# Altium PCB HEAD_PCB.PcbDoc
Units mm, origin at the board's own origin, x right, y up, seen from the top; angles counter-clockwise.
Board outline 50 x 50 mm, 4 copper layers (L1 (Signal), L2 (GND), L3 (+3V3), L4 (Signal)), stack 1.586 mm thick; 73 components, 49 nets, 271 pads, 159 vias.
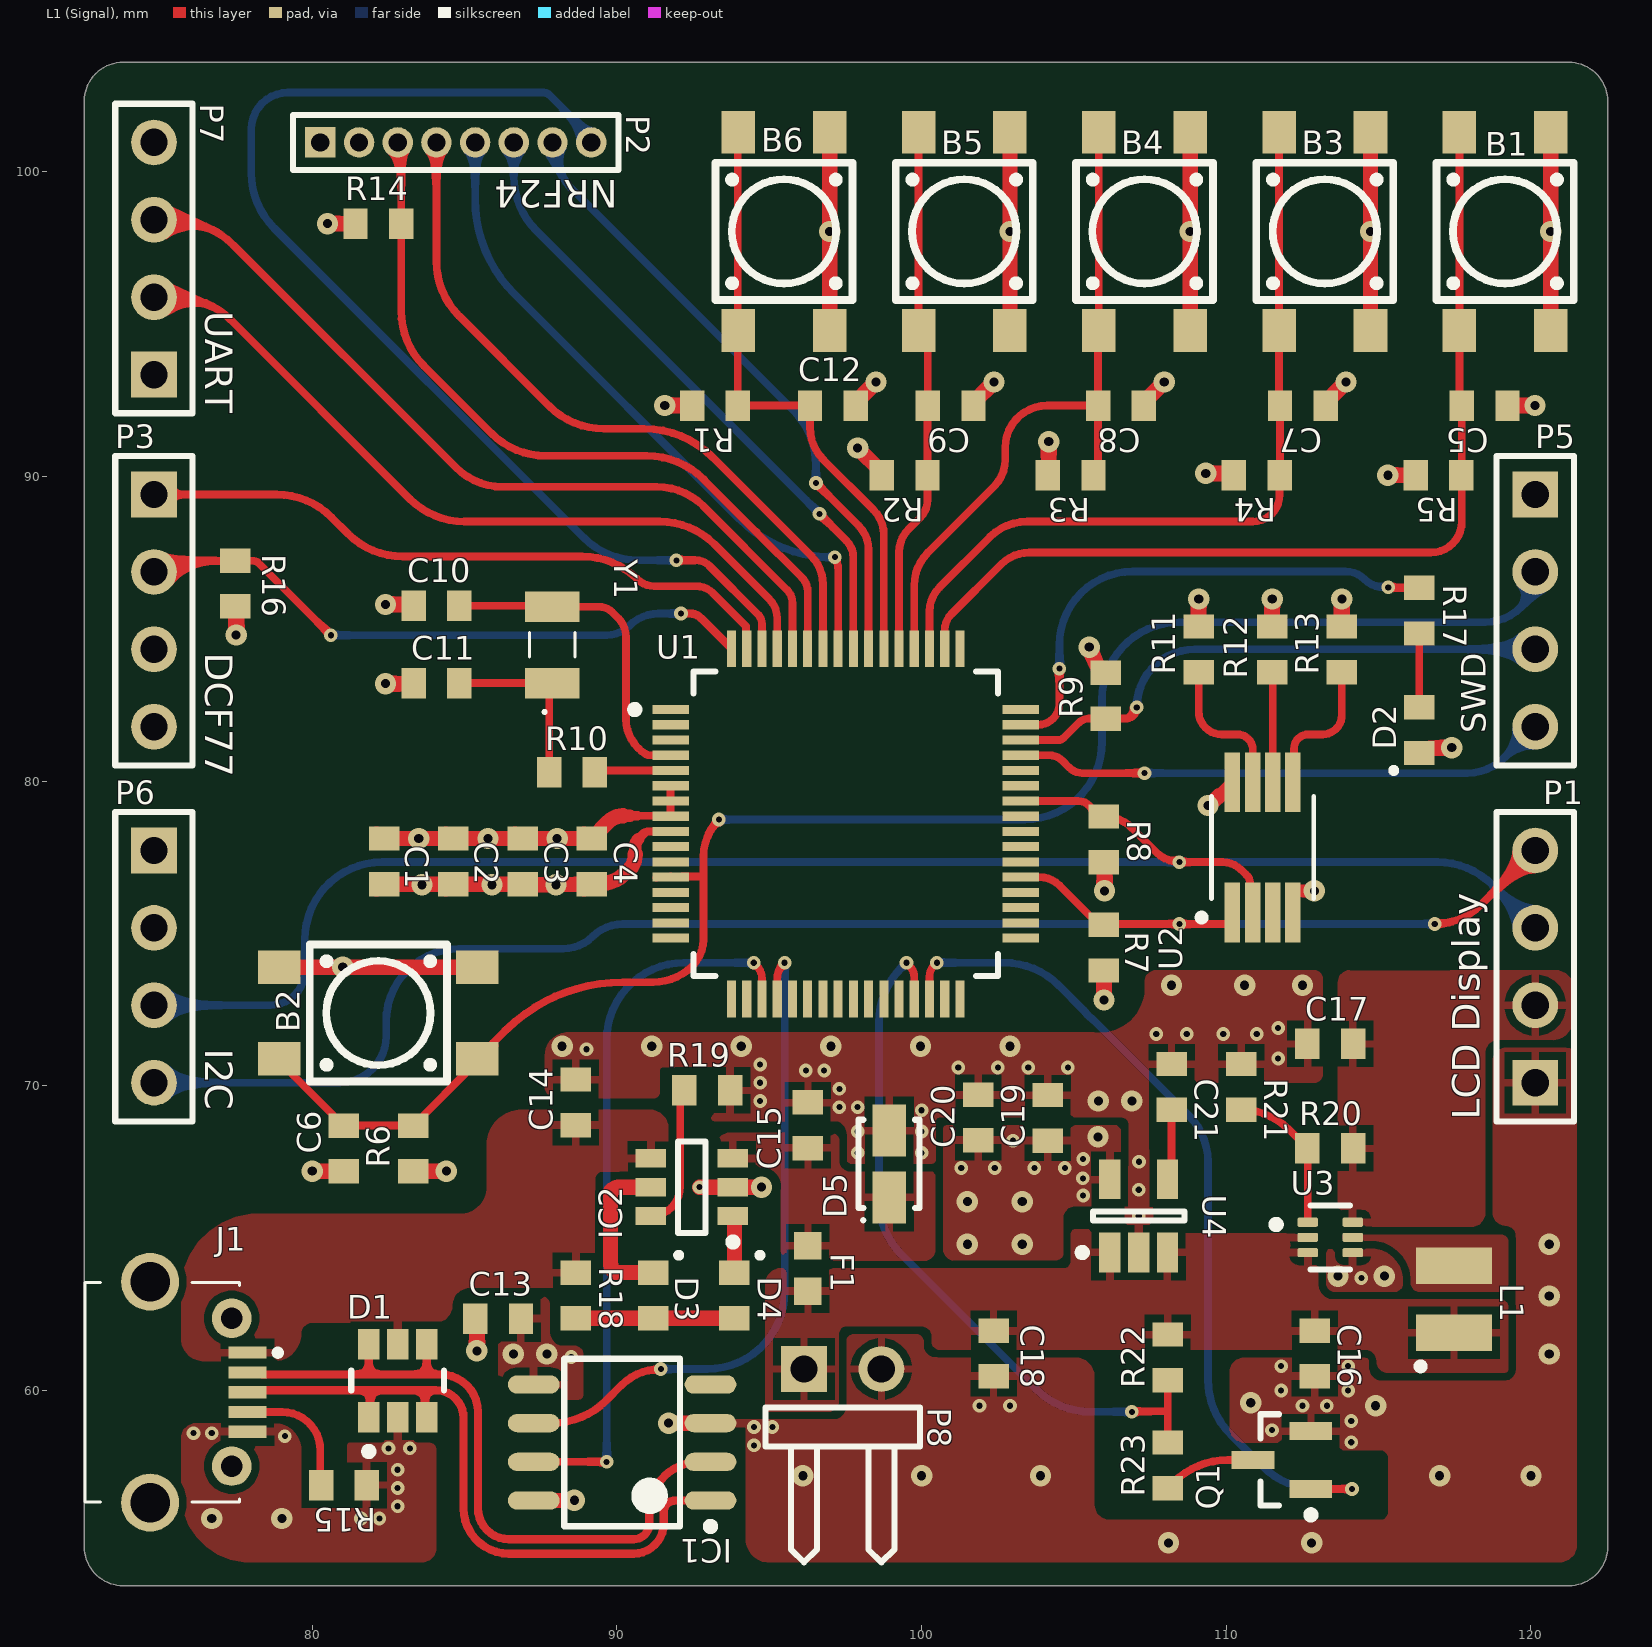
[diagram p0: L1 (Signal) view]
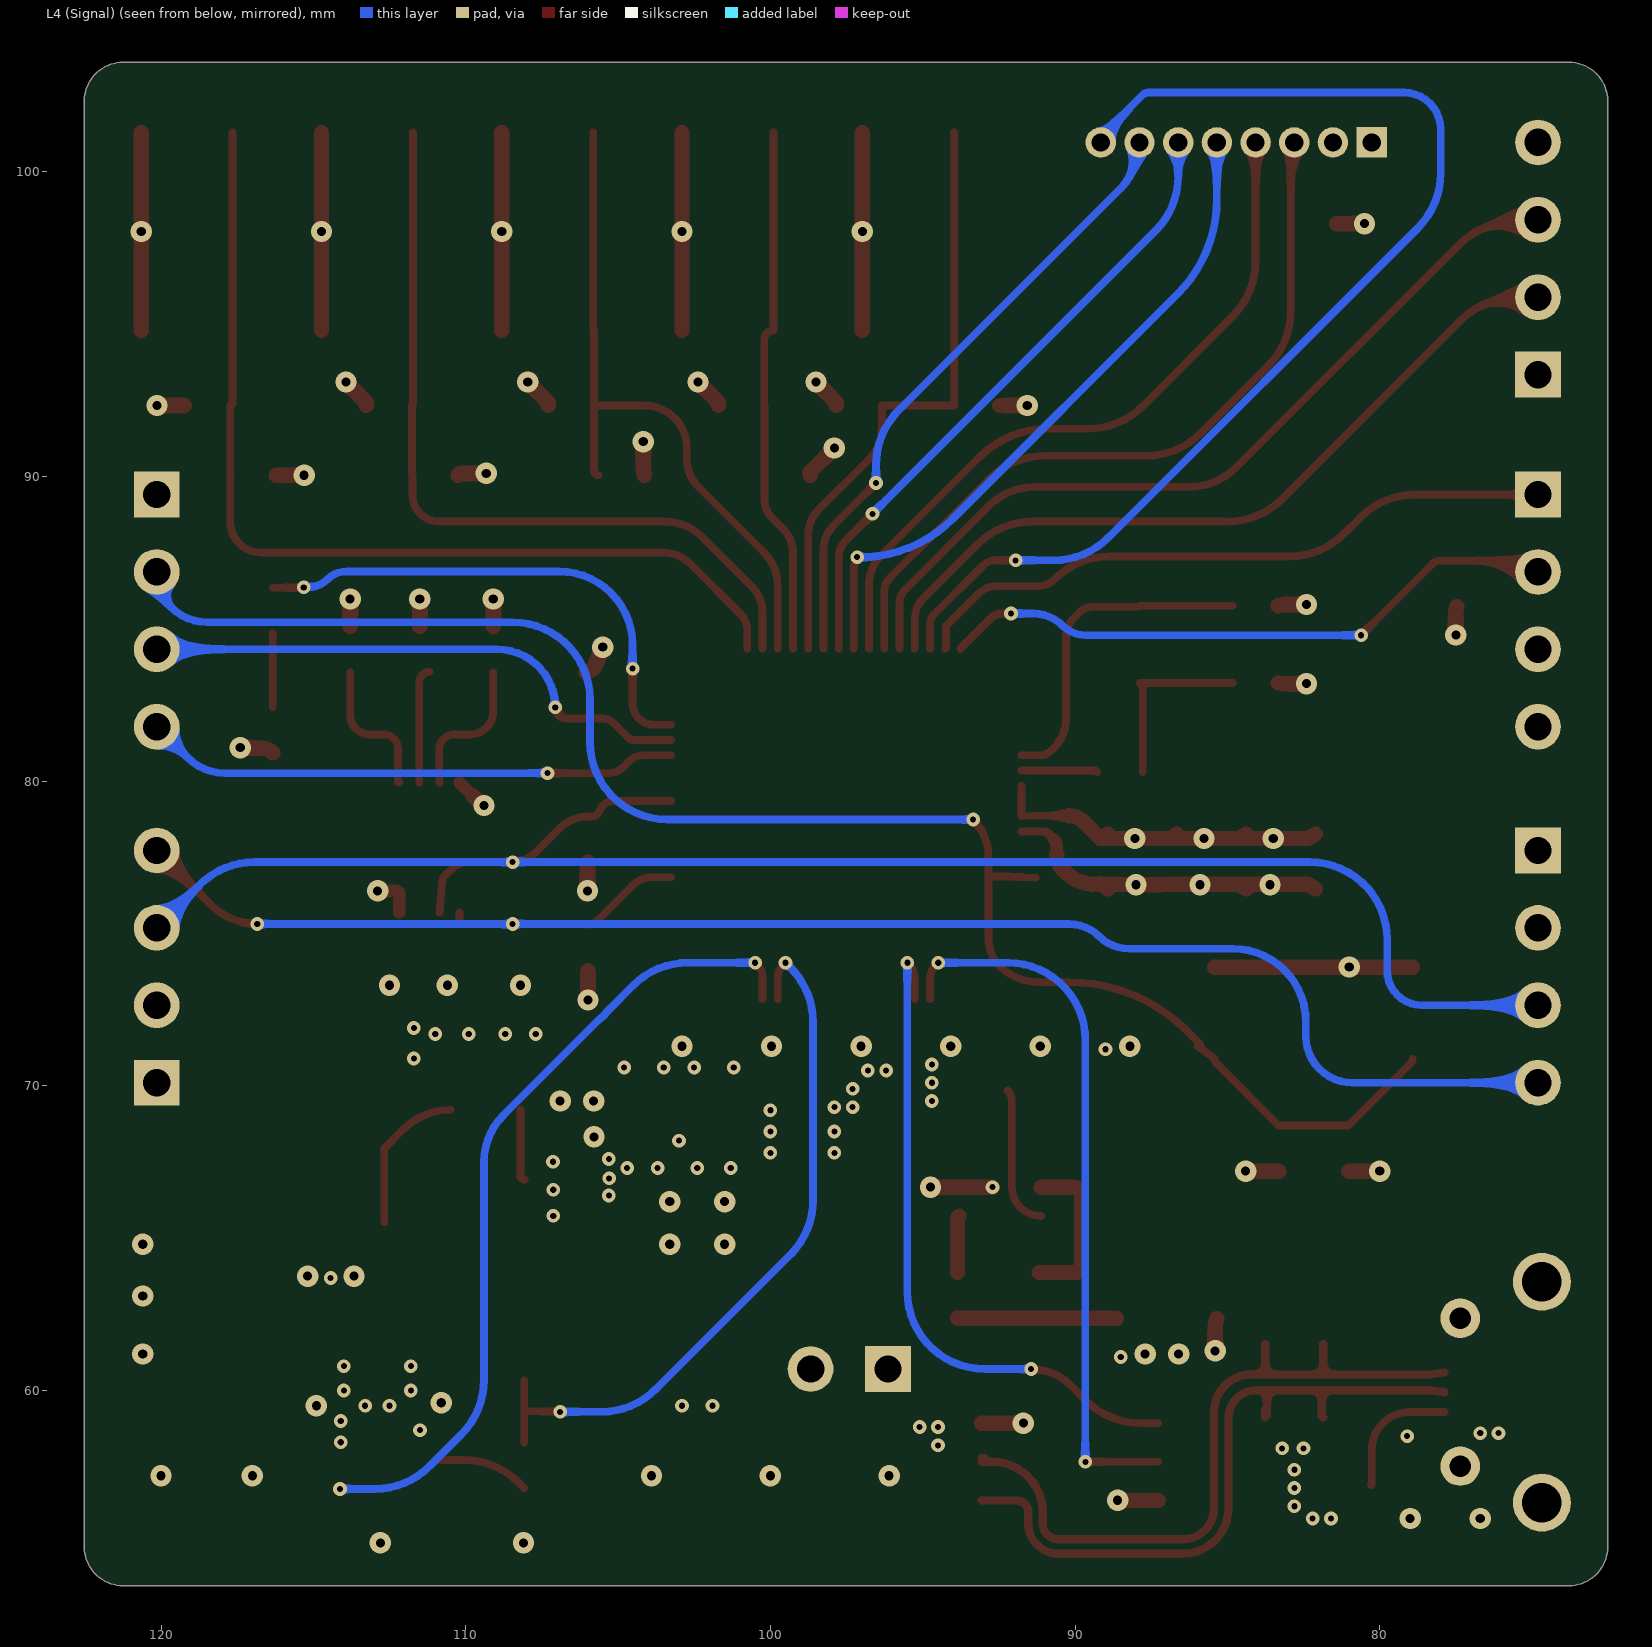
[diagram p1: L4 (Signal) view, seen from below]
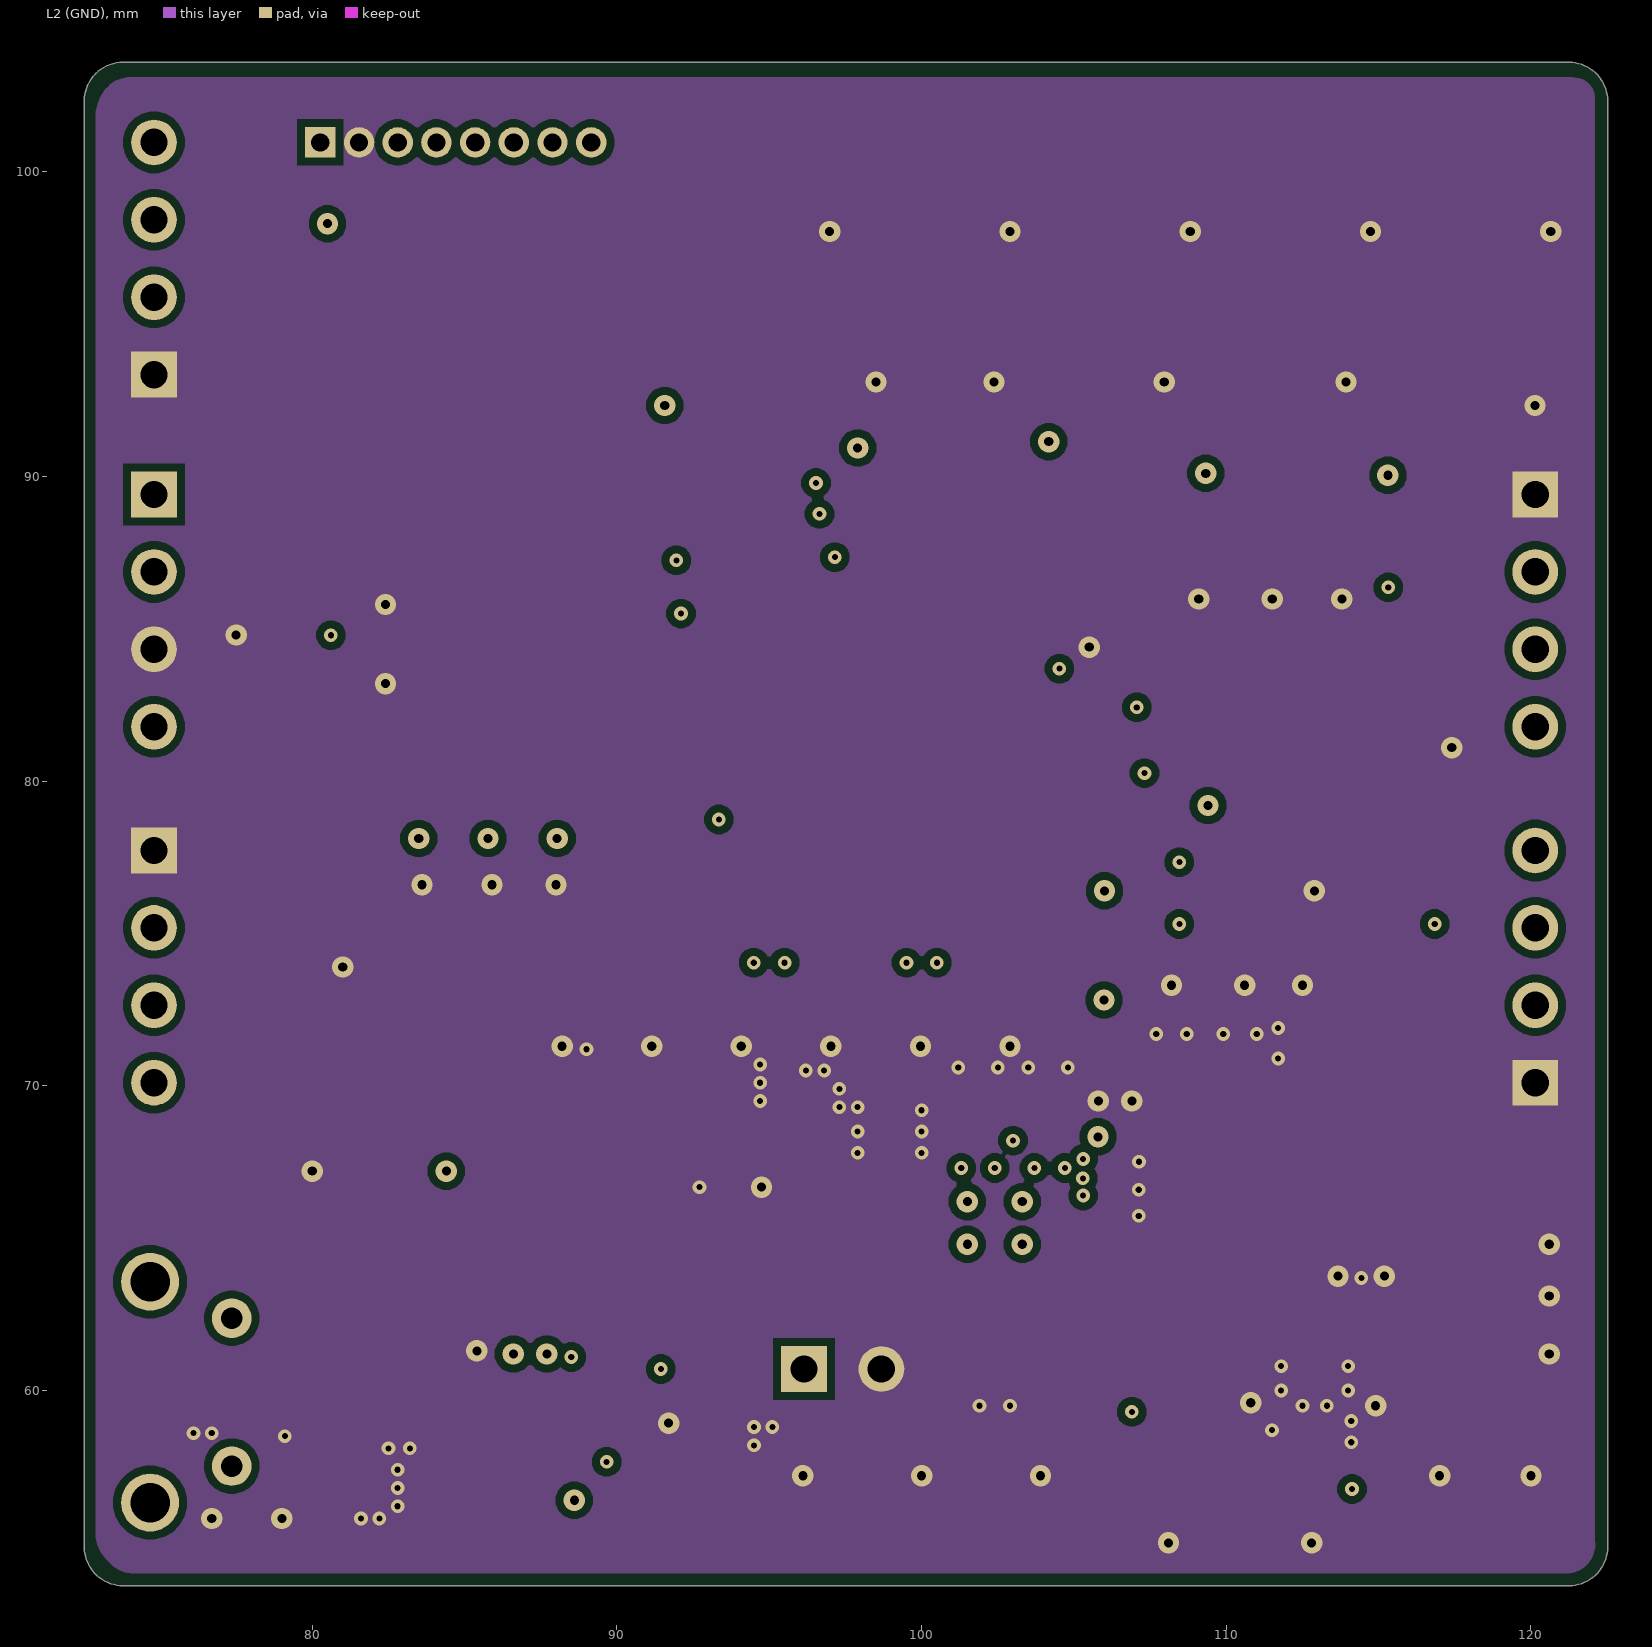
[diagram p2: L2 (GND)]
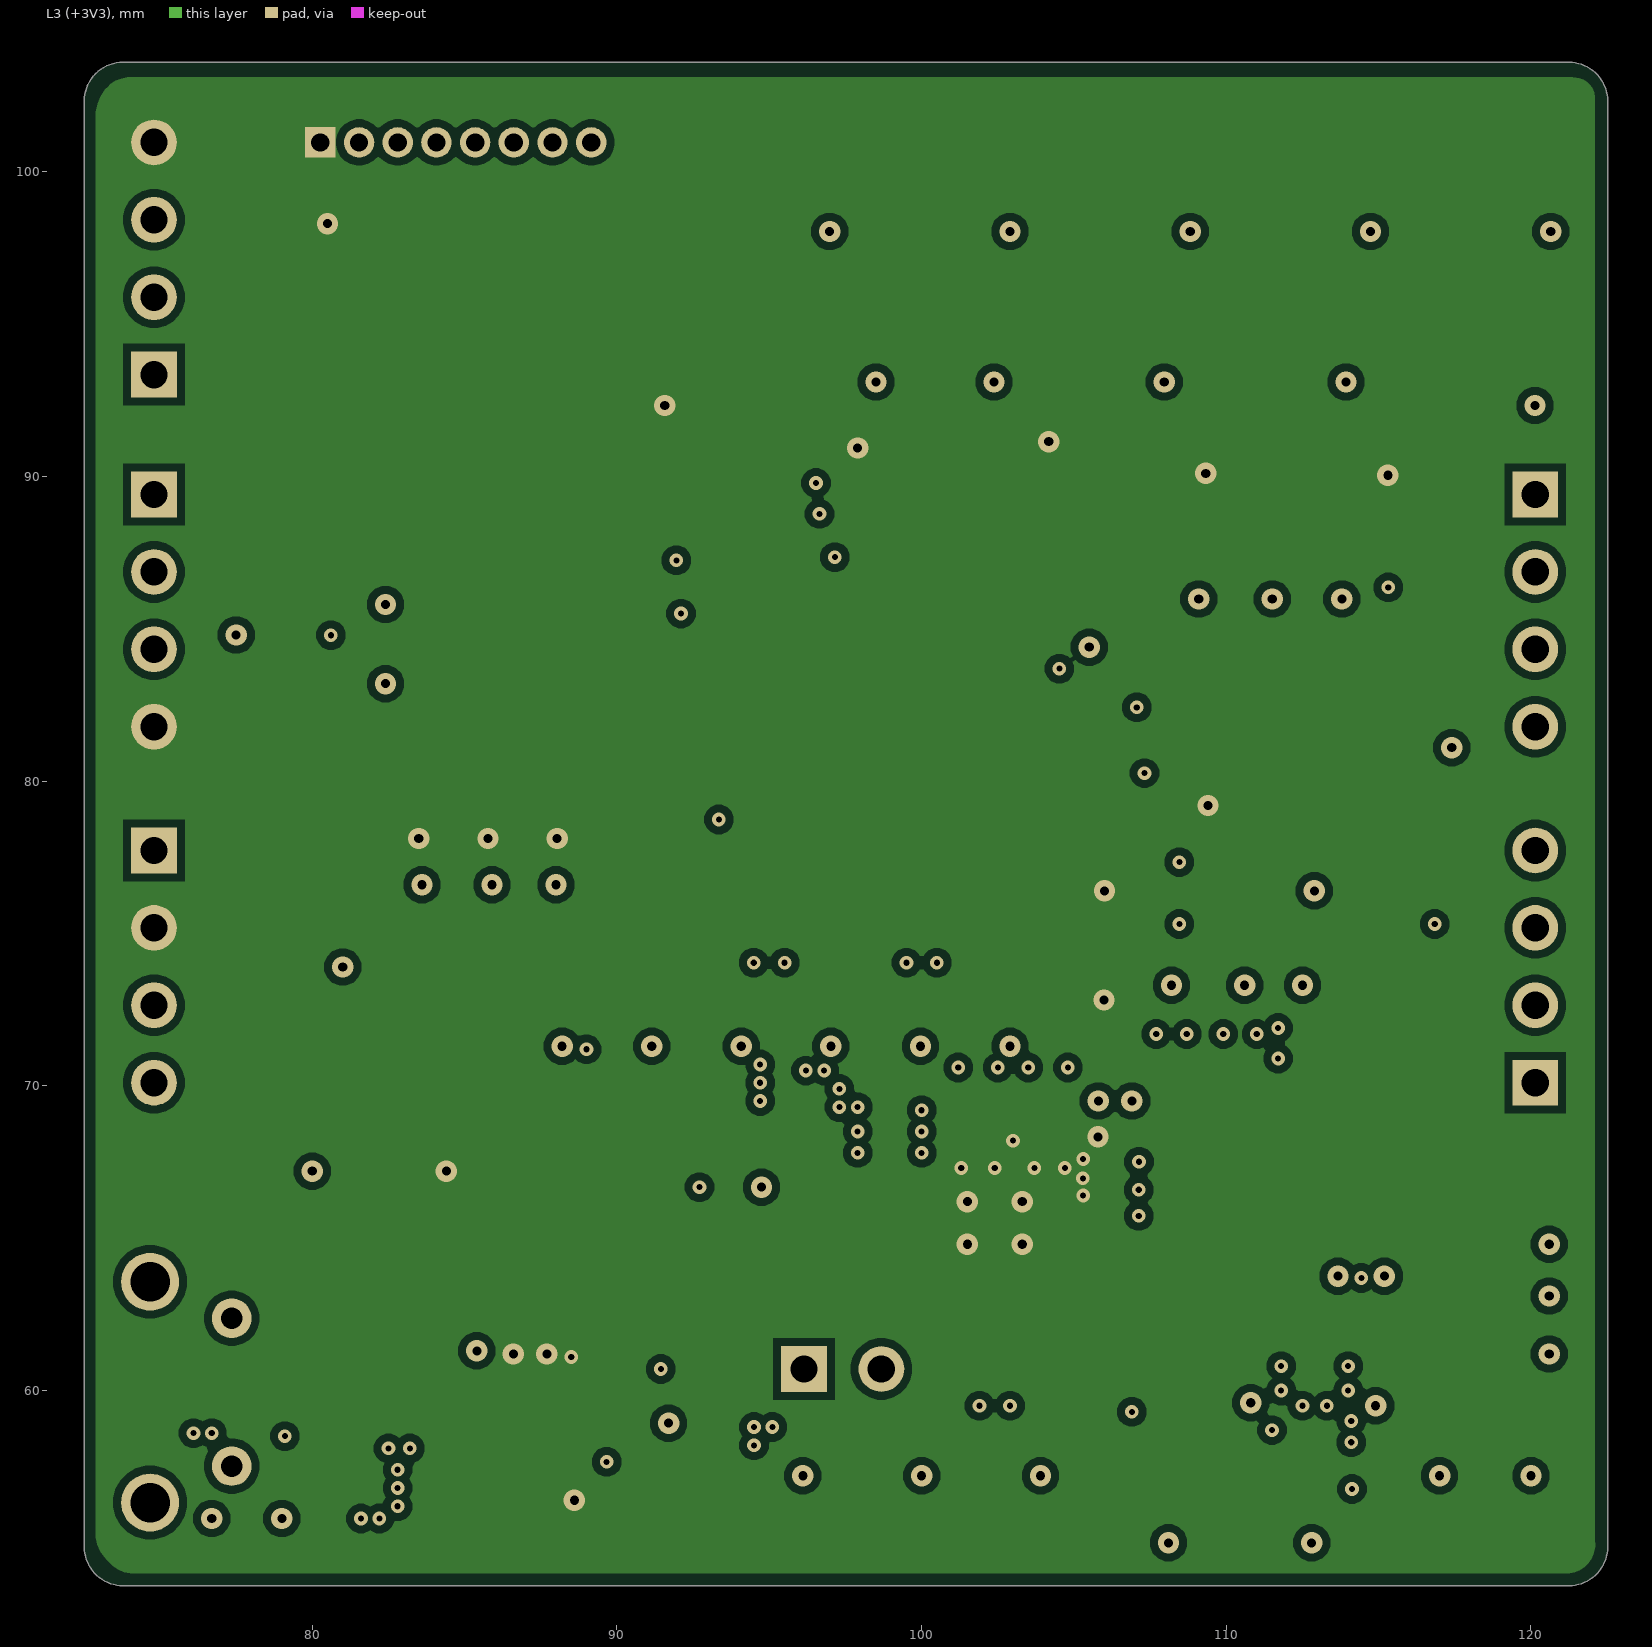
[diagram p3: L3 (+3V3)]
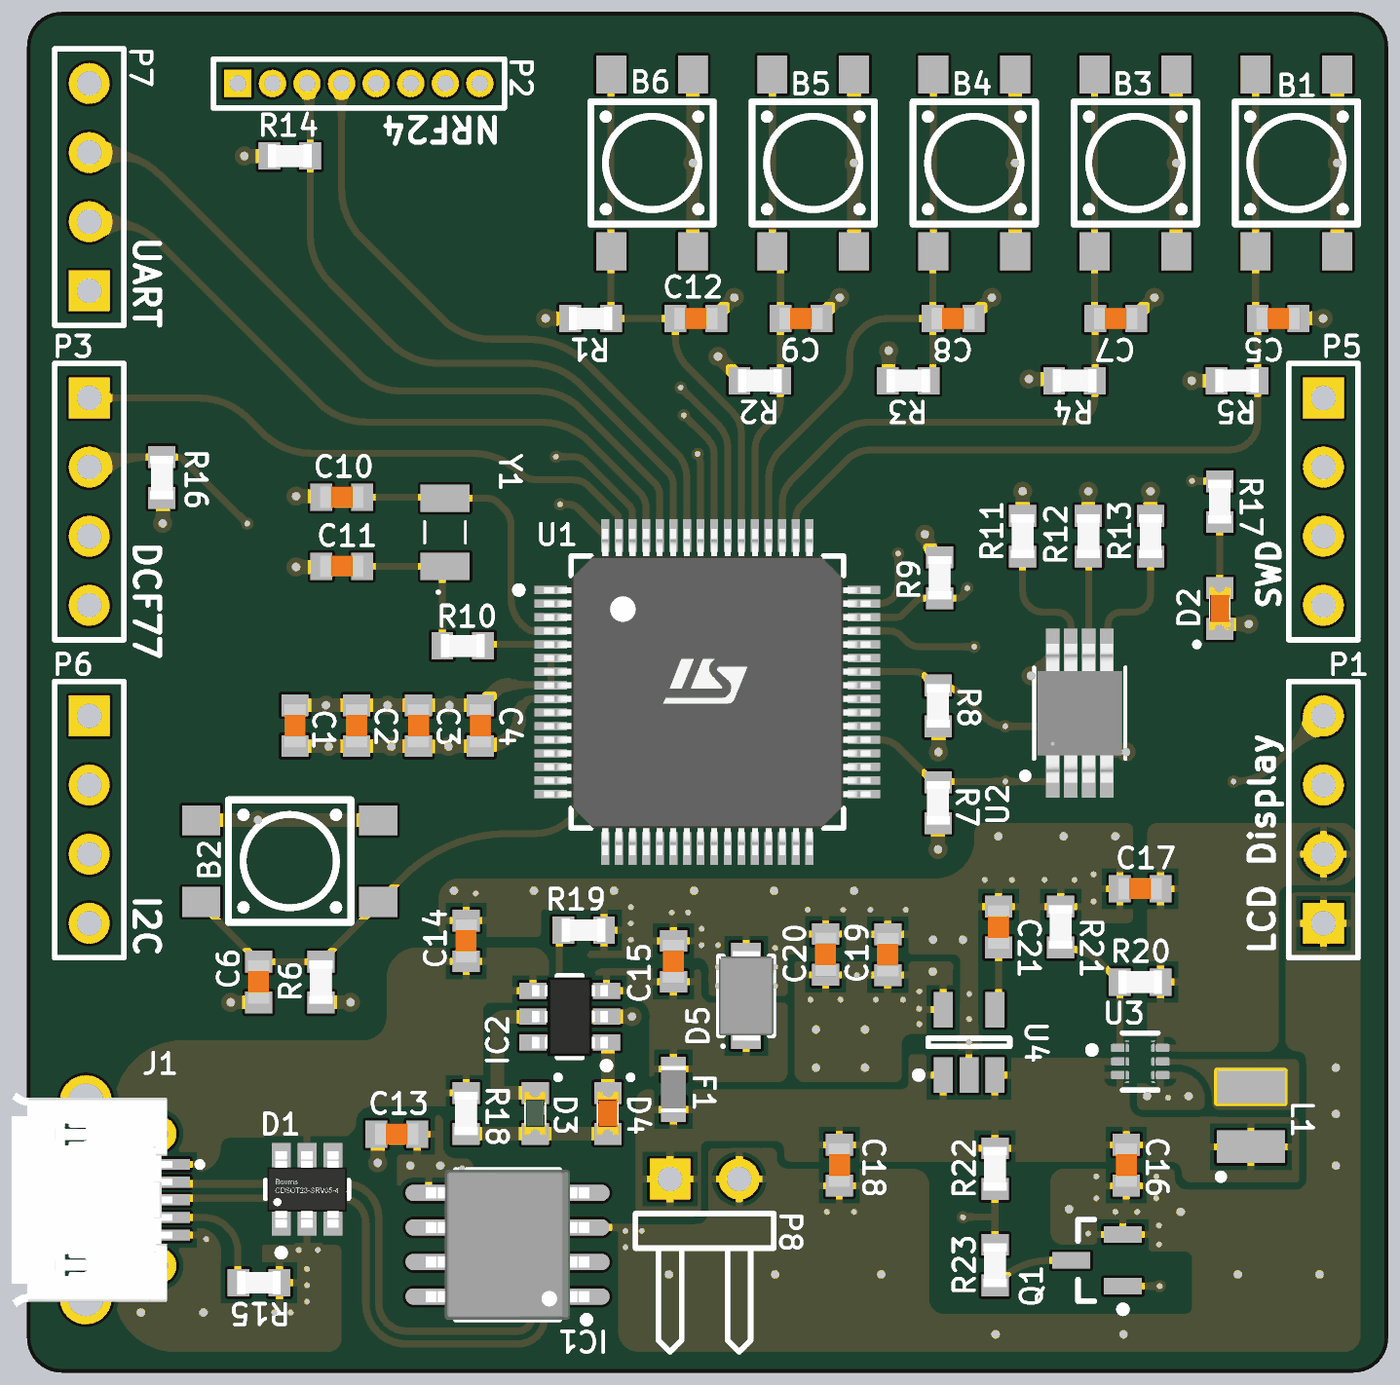
[diagram p4: 3D render of the assembled board from above, using the file's embedded part models]

## Layer stack, top to bottom
Top Solder: solder mask 0.0254, SM-001, Dk 4
L1 (Signal): signal copper 0.035
Dielectric 1: prepreg 0.2104, PP-017, Dk 4.6
L2 (GND): signal copper 0.0152
Dielectric 3: core 1.065, Core-039, Dk 4.6
L3 (+3V3): signal copper 0.0152
Dielectric 5: prepreg 0.2104, PP-017, Dk 4.6
L4 (Signal): signal copper 0.035
Bottom Solder: solder mask 0.0254, SM-001, Dk 4

## Board outline
72.517,54.864 ccw(c73.787,54.864) 73.787,53.594 121.247,53.594 ccw(c121.247,54.864) 122.517,54.864 122.517,102.324 ccw(c121.247,102.324) 121.247,103.594 73.787,103.594 ccw(c73.787,102.324) 72.517,102.324

## Design rules (kind name [scope] priority, off if disabled: settings)
BoardOutlineClearance [All] p1: gap=0.2 ignorepadtopadclearanceinfootprint=FALSE except(0: Arc-SplitContinuation Track-SplitContinuation SMDPad-SplitContinuation THPad-SplitContinuation Via-SplitContinuation Fill-SplitContinuation Poly-SplitContinuation Region-SplitContinuation Text-SplitContinuation)
Clearance [All] p1: gap=0.254 ignorepadtopadclearanceinfootprint=FALSE except(0: Arc-Hole Track-Hole SMDPad-Hole THPad-Hole Via-Hole Fill-Hole Poly-Hole Region-Hole Text-Hole; 0.089: Arc-Arc Arc-Track Track-Track; 0.127: SMDPad-SMDPad; 0.2: Arc-SMDPad Track-SMDPad THPad-THPad; 0.33: Arc-THPad Track-THPad)
DiffPairsRouting [All] p1: maxlimit=0.254 minlimit=0.203 mostfreqgap=0.254 toplayer_maxgap=0.203 toplayer_prefgap=0.203 toplayer_minwidth=0.271 toplayer_maxwidth=0.271 toplayer_prefwidth=0.271 bottomlayer_maxgap=0.203 bottomlayer_prefgap=0.203 bottomlayer_minwidth=0.271 bottomlayer_maxwidth=0.271 bottomlayer_prefwidth=0.271 impedanceprofiledriven=TRUE impedanceprofileid={BEAADC6F-D367-4AB9-B368-EC0718F44D95} impedanceprofilevalue=90.000000 maxuncoupledlength=12.7
HoleSize [All] p1: absolutevalues=TRUE maxlimit=6.3 minlimit=0.2 maxpercent=80.000 minpercent=20.000
PolygonConnect PolygonConnect_5 [All vs IsNamedPolygon('+3V3_L03_P013')] p1: thpad.connectstyle=Direct thpad.reliefconductorwidth=0.254 thpad.reliefentries=4 thpad.polygonreliefangle="90 Angle" thpad.airgapwidth=0.254 smdpad.connectstyle=Relief smdpad.reliefconductorwidth=0.254 smdpad.reliefentries=4 smdpad.polygonreliefangle="90 Angle" smdpad.airgapwidth=0.254 via.connectstyle=Direct via.reliefconductorwidth=0.254 via.reliefentries=4 via.polygonreliefangle="90 Angle" via.airgapwidth=0.254
PolygonConnect PolygonConnect_4 [All vs IsNamedPolygon('+3V3_L03_P012')] p2: thpad.connectstyle=Direct thpad.reliefconductorwidth=0.254 thpad.reliefentries=4 thpad.polygonreliefangle="90 Angle" thpad.airgapwidth=0.254 smdpad.connectstyle=Relief smdpad.reliefconductorwidth=0.254 smdpad.reliefentries=4 smdpad.polygonreliefangle="90 Angle" smdpad.airgapwidth=0.254 via.connectstyle=Direct via.reliefconductorwidth=0.254 via.reliefentries=4 via.polygonreliefangle="90 Angle" via.airgapwidth=0.254
PolygonConnect PolygonConnect_3 [All vs IsNamedPolygon('GND_L02_P011')] p3: thpad.connectstyle=Direct thpad.reliefconductorwidth=0.254 thpad.reliefentries=4 thpad.polygonreliefangle="90 Angle" thpad.airgapwidth=0.254 smdpad.connectstyle=Relief smdpad.reliefconductorwidth=0.254 smdpad.reliefentries=4 smdpad.polygonreliefangle="90 Angle" smdpad.airgapwidth=0.254 via.connectstyle=Direct via.reliefconductorwidth=0.254 via.reliefentries=4 via.polygonreliefangle="90 Angle" via.airgapwidth=0.254
PolygonConnect PolygonConnect_2 [All vs IsNamedPolygon('TPS61023DRLR_SW_L01_P002')] p4: thpad.connectstyle=Relief thpad.reliefconductorwidth=0.254 thpad.reliefentries=4 thpad.polygonreliefangle="90 Angle" thpad.airgapwidth=0.254 smdpad.connectstyle=Direct smdpad.reliefconductorwidth=0.254 smdpad.reliefentries=4 smdpad.polygonreliefangle="90 Angle" smdpad.airgapwidth=0.254 via.connectstyle=Relief via.reliefconductorwidth=0.254 via.reliefentries=4 via.polygonreliefangle="90 Angle" via.airgapwidth=0.254
PolygonConnect PolygonConnect_1 [All vs IsNamedPolygon('TPS61023DRLR_SW_L01_P001')] p5: thpad.connectstyle=Relief thpad.reliefconductorwidth=0.254 thpad.reliefentries=4 thpad.polygonreliefangle="90 Angle" thpad.airgapwidth=0.254 smdpad.connectstyle=Direct smdpad.reliefconductorwidth=0.254 smdpad.reliefentries=4 smdpad.polygonreliefangle="90 Angle" smdpad.airgapwidth=0.254 via.connectstyle=Relief via.reliefconductorwidth=0.254 via.reliefentries=4 via.polygonreliefangle="90 Angle" via.airgapwidth=0.254
PolygonConnect [All] p6: thpad.connectstyle=Relief thpad.reliefconductorwidth=0.254 thpad.reliefentries=4 thpad.polygonreliefangle="90 Angle" thpad.airgapwidth=0.254 smdpad.connectstyle=Relief smdpad.reliefconductorwidth=0.254 smdpad.reliefentries=4 smdpad.polygonreliefangle="90 Angle" smdpad.airgapwidth=0.254 via.connectstyle=Direct via.reliefconductorwidth=0.254 via.reliefentries=4 via.polygonreliefangle="90 Angle" via.airgapwidth=0.254
RoutingVias [All] p1: holewidth=0.2 width=0.4 viastyle="Through Hole" minholewidth=0.2 minwidth=0.4 maxholewidth=0.711 maxwidth=1.27
SolderMaskExpansion SolderMaskExpansion_via [IsVia] p1: expansion=0.102 istentingtop=TRUE
SolderMaskExpansion [All] p2: expansion=0.102 istentingtop=FALSE
UnRoutedNet [All] p1: checkbadconnections=TRUE
Width [All] p1: maxlimit=1 minlimit=0.09 preferedwidth=0.3 midlayer1_minwidth=0.254 midlayer1_maxwidth=0.254 midlayer1_prefwidth=0.254 midlayer2_minwidth=0.254 midlayer2_maxwidth=0.254 midlayer2_prefwidth=0.254 minimp=50.000000 maximp=50.000000 favimp=50.000000
27 further rules are at their usual default settings.

## Classes and differential pairs
differential pair class DIFF_USB: USB_D
component class uController_and_communication: B1 B2 B3 B4 B5 B6 C1 C2 C3 C4 C5 C6 C7 C8 C9 C10 C11 C12 C13 D1 D2 IC1 J1 P1 P2 P3 P5 P6 P7 R1 R2 R3 R4 R5 R6 R7 R8 R9 R10 R11 R12 R13 R14 R15 R16 R17 U1 U2 Y1
component class Power: C14 C15 C16 C17 C18 C19 C20 C21 D3 D4 D5 F1 IC2 L1 P8 Q1 R18 R19 R20 R21 R22 R23 U3 U4
differential pair USB_D: +USB_D_P -USB_D_N

## Components (designator, comment, footprint, x,y, rotation, side; value= is the part's Value field where it differs from the comment)
B1 "TS-1109S-C-A" SMD_BUTTON 119.15,98.044 r90 top
B2 "TS-1109S-C-A" SMD_BUTTON 82.169,72.39 r0 top
B3 "TS-1109S-C-A" SMD_BUTTON 113.232,98.044 r90 top
B4 "TS-1109S-C-A" SMD_BUTTON 107.315,98.044 r90 top
B5 "TS-1109S-C-A" SMD_BUTTON 101.397,98.044 r90 top
B6 "TS-1109S-C-A" SMD_BUTTON 95.48,98.044 r90 top
C1 "2.2u" CAP_0603 82.359,77.367 r90 top
C2 "100n" CAP_0603 84.63,77.367 r90 top
C3 "100n" CAP_0603 86.901,77.367 r90 top
C4 "100n" CAP_0603 89.171,77.367 r90 top
C5 "100n" CAP_0603 118.479,92.329 r0 top
C6 "100n" CAP_0603 81.026,67.945 r90 top
C7 "100n" CAP_0603 112.51,92.329 r0 top
C8 "100n" CAP_0603 106.541,92.329 r0 top
C9 "100n" CAP_0603 100.953,92.329 r0 top
C10 "15p" CAP_0603 84.078,85.761 r0 top
C11 "15p" CAP_0603 84.078,83.221 r0 top
C12 "100n" CAP_0603 97.085,92.329 r0 top
C13 "100n" CAP_0603 86.1,62.354 r0 top
C14 "10u" CAP_0603 88.646,69.457 r270 top
C15 "10u" CAP_0603 96.266,68.707 r270 top
C16 "10u" CAP_0603 112.903,61.214 r90 top
C17 "10u" CAP_0603 113.411,71.374 r0 top
C18 "1u" CAP_0603 102.362,61.214 r90 top
C19 "1u" CAP_0603 104.14,68.949 r270 top
C20 "22u" CAP_0603 101.854,68.961 r270 top
C21 "10n" CAP_0603 108.204,69.965 r270 top
D1 "CDSOT23-SRV05-4" FP-CDSOT23-SRV05-4-MFG 82.804,60.325 r90 top
D2 "RED" LED_0603_RED 116.332,81.673 r90 top
D3 "GREEN" LED_0603_GREEN 91.186,63.119 r270 top
D4 "RED" LED_0603_RED 93.853,63.119 r270 top
D5 "D_TVS" DIOM2718X14N 98.933,67.437 r90 top
F1 "T0603HI2000TM" RESC1608X06N 96.266,64.008 r270 top
IC1 "CH340N" SOP127P600X190-8N 90.17,58.293 r180 top
IC2 "SD8067C" SOT95P280X125-6N 92.456,66.675 r180 top
J1 "MICROXNJ" MICROXNJ 74.676,59.944 r90 top
L1 "1u" IND_1210 117.475,62.992 r90 top
P1 "LCD-I2C-IF" HDR1X4 120.142,70.104 r90 top
P2 "NRF24L01" MHDR1X8 80.264,100.965 r0 top
P3 "DCF77" HDR1X4 74.803,89.408 r270 top
P5 "SWD" HDR1X4 120.142,89.408 r270 top
P6 "PLUS-I2C" HDR1X4 74.803,77.724 r270 top
P7 "PLUS-UART" HDR1X4 74.803,93.345 r90 top
P8 "Li-Po" HDR1X2H 96.139,60.706 r0 top
Q1 "SI2302DS,215" NXP-SOT23_N 111.826,57.719 r180 top
R1 "100k" RES_0603 93.218,92.329 r180 top
R2 "100k" RES_0603 99.441,90.043 r180 top
R3 "100k" RES_0603 104.89,90.043 r180 top
R4 "100k" RES_0603 110.998,90.043 r180 top
R5 "100k" RES_0603 116.967,90.043 r180 top
R6 "10k" RES_0603 83.312,67.945 r270 top
R7 "4.7k" RES_0603 105.983,74.534 r90 top
R8 "4.7k" RES_0603 105.983,78.09 r90 top
R9 "10k" RES_0603 106.045,82.804 r90 top
R10 "0R" RES_0603 88.523,80.3 r180 top
R11 "100k" RES_0603 109.093,84.328 r90 top
R12 "100k" RES_0603 111.506,84.328 r90 top
R13 "100k" RES_0603 113.792,84.328 r90 top
R14 "10k" RES_0603 82.169,98.298 r0 top
R15 "100k" RES_0603 81.038,56.896 r0 top
R16 "10k" RES_0603 77.47,86.487 r270 top
R17 "1k" RES_0603 116.332,85.598 r90 top
R18 "1k" RES_0603 88.646,63.119 r90 top
R19 "2.2k" RES_0603 92.964,69.85 r0 top
R20 "750k" RES_0603 113.411,67.945 r0 top
R21 "100k" RES_0603 110.49,69.965 r270 top
R22 "10k" RES_0603 108.077,61.087 r90 top
R23 "10k" RES_0603 108.077,57.543 r90 top
U1 "STM32G070RBT6" FP-LQFP64-5W-MFG 97.509,78.6 r0 top
U2 "LM75BDP" TSSOP8_3P1X3P1_NXP-M 111.19,77.824 r90 top
U3 "TPS61023DRLR" FP-DRL0006A-MFG 113.411,65.024 r0 top
U4 "LDS3985M33R" SOT23-5L_M 107.122,65.729 r90 top
Y1 "Q13FC1350000400" Q13FC1350000400 87.876,84.471 r90 top

## Footprints (in the part's own frame and the unit in brackets; to place one, negate y for a bottom-side part, rotate by r counter-clockwise, add the part's x,y. Pads: shape width x height; smd on the part's side, far side on the other; paste and mask are expansions set on the pad)
CAP_0603 [mm]
  rect 0.8x1 smd: 1(-0.75,0) 2(0.75,0)
  body extent -0.8,-0.4 0.8,0.4, height 0.51
DIOM2718X14N [mm] "Molded Diode, 2-Leads, Body 2,70x1,80mm, IPC Medium Density"
  rect 1.7x1.1 smd: 1(-1.1,0) 2(1.1,0)
  silkscreen extent -1.9,-1 1.45,1, body extent -1.67,-1 1.67,1, height 1.35
FP-CDSOT23-SRV05-4-MFG [mm]
  rect 1x0.7 smd paste+0 mask+0: 1(-1.2,0.95) 2(-1.2,0) 3(-1.2,-0.95) 4(1.2,-0.95) 5(1.2,0) 6(1.2,0.95)
  silkscreen extent -2.45,-1.53 0.33,1.53, body extent -1.8,-1.63 1.8,1.63, height 0.25
FP-DRL0006A-MFG [mm]
  rrect33% 0.67x0.3 smd paste+0 mask+0: 1(-0.74,0.5) 2(-0.74,0) 3(-0.74,-0.5) 4(0.74,-0.5) 5(0.74,0) 6(0.74,0.5)
  silkscreen extent -1.9,-1.05 0.65,1.05, body extent -1.17,-1.1 1.17,1.1, height 0.25
FP-LQFP64-5W-MFG [mm]
  rect 1.2x0.3 smd paste+0 mask+0: 1(-5.75,3.75) 2(-5.75,3.25) 3(-5.75,2.75) 4(-5.75,2.25) 5(-5.75,1.75) 6(-5.75,1.25) 7(-5.75,0.75) 8(-5.75,0.25) 9(-5.75,-0.25) 10(-5.75,-0.75) 11(-5.75,-1.25) 12(-5.75,-1.75) 13(-5.75,-2.25) 14(-5.75,-2.75) 15(-5.75,-3.25) 16(-5.75,-3.75) 33(5.75,-3.75) 34(5.75,-3.25) 35(5.75,-2.75) 36(5.75,-2.25) 37(5.75,-1.75) 38(5.75,-1.25) 39(5.75,-0.75) 40(5.75,-0.25) 41(5.75,0.25) 42(5.75,0.75) 43(5.75,1.25) 44(5.75,1.75) 45(5.75,2.25) 46(5.75,2.75) 47(5.75,3.25) 48(5.75,3.75)
  rect 0.3x1.2 smd paste+0 mask+0: 17(-3.75,-5.75) 18(-3.25,-5.75) 19(-2.75,-5.75) 20(-2.25,-5.75) 21(-1.75,-5.75) 22(-1.25,-5.75) 23(-0.75,-5.75) 24(-0.25,-5.75) 25(0.25,-5.75) 26(0.75,-5.75) 27(1.25,-5.75) 28(1.75,-5.75) 29(2.25,-5.75) 30(2.75,-5.75) 31(3.25,-5.75) 32(3.75,-5.75) 49(3.75,5.75) 50(3.25,5.75) 51(2.75,5.75) 52(2.25,5.75) 53(1.75,5.75) 54(1.25,5.75) 55(0.75,5.75) 56(0.25,5.75) 57(-0.25,5.75) 58(-0.75,5.75) 59(-1.25,5.75) 60(-1.75,5.75) 61(-2.25,5.75) 62(-2.75,5.75) 63(-3.25,5.75) 64(-3.75,5.75)
  silkscreen extent -7.05,-5 5,5, body extent -6.45,-6.45 6.45,6.45, height 0.25
HDR1X2H [mm] "Connector; Header; 2 Position; Right Angle"
  rect 1.5x1.5 hole 0.9: 1(0,0)
  round 1.5 hole 0.9: 2(2.54,0)
  silkscreen extent -1.27,-6.35 3.81,-1.27
HDR1X4 [mm] "Connector; Header; 4 Position"
  rect 1.5x1.5 hole 0.9: 1(0,0)
  round 1.5 hole 0.9: 2(2.54,0) 3(5.08,0) 4(7.62,0)
  silkscreen extent -1.27,-1.27 8.89,1.27
IND_1210 [mm]
  rect 1.2x2.5 smd: 1(-1.1,0) 2(1.1,0)
  silkscreen extent -2.3,1 -2.1,1.2
LED_0603_GREEN [mm]
  rect 0.8x1 smd: A(0.75,0) K(-0.75,0)
  silkscreen extent -1.37,0.79 -1.27,0.89, body extent -0.8,-0.4 0.8,0.4, height 0.6
LED_0603_RED [mm]
  rect 0.8x1 smd: A(0.75,0) K(-0.75,0)
  silkscreen extent -1.37,0.79 -1.27,0.89, body extent -0.8,-0.4 0.8,0.4, height 0.6
MHDR1X8 [mm] "Connector; Header; 8 Position"
  rect 1x1 hole 0.6: 1(0,0)
  round 1 hole 0.6: 2(1.27,0) 3(2.54,0) 4(3.81,0) 5(5.08,0) 6(6.35,0) 7(7.62,0) 8(8.89,0)
  silkscreen extent -0.9,-0.9 9.79,0.9
MICROXNJ [mm]
  rect 0.4x1.25 smd: 1(1.3,-3.2) 2(0.65,-3.2) 3(0,-3.2) 4(-0.65,-3.2) 5(-1.3,-3.2)
  round 1.3 hole 0.7: MH1(2.425,-2.68) MH2(-2.425,-2.68)
  round 1.9 hole 1.3: MH3(3.625,0) MH4(-3.625,0)
  silkscreen extent -3.6,-4.29 3.6,2.13, body extent -3.95,-3.18 3.95,2.72, height 2.55
NXP-SOT23_N [mm] "SOT23, 3-Leads, Body 3x1.4mm, Pitch 0.95mm, IPC Medium Density"
  rect 1.4x0.6 smd: 1(-0.95,0.95) 2(-0.95,-0.95) 3(0.95,0)
  silkscreen extent -1.08,-1.5 0.7,1.92, body extent -0.7,-1.5 0.7,1.5, height 1.1
Q13FC1350000400 [mm]
  rect 1x1.8 smd: 1(-1.25,0) 2(1.25,0)
  silkscreen extent -2.25,-0.75 0.4,0.75
RES_0603 [mm]
  rect 0.8x1 smd: 1(-0.75,0) 2(0.75,0)
  body extent -0.8,-0.43 0.8,0.43, height 0.52
RESC1608X06N [mm] "Chip Resistor, 2-Leads, Body 1,60x0,80mm, IPC Medium Density"
  rect 0.9x0.9 smd: 1(-0.75,0) 2(0.75,0)
  body extent -0.85,-0.45 0.85,0.45, height 0.6
SMD_BUTTON [mm]
  rect 1.4x1.1 smd: 1(-3.25,1.5) 2(3.25,1.5) 3(-3.25,-1.5) 4(3.25,-1.5)
  silkscreen extent -2.25,-2.25 2.25,2.25
SOP127P600X190-8N [mm] "SOP, 8-Leads, Body 5,15x4,45mm, Pitch 1,27mm, IPC Medium Density"
  oval 1.7x0.6 smd: 1(-2.9,1.905) 2(-2.9,0.635) 3(-2.9,-0.635) 4(-2.9,-1.905) 5(2.9,-1.905) 6(2.9,-0.635) 7(2.9,0.635) 8(2.9,1.905)
  silkscreen extent -3.03,-2.75 1.9,2.88, body extent -3,-2.75 3,2.75, height 1.9
SOT23-5L_M [mm] "SOT23, 5-Leads, Body 2.9x1.6mm, Pitch 0.95mm, Lead Span 2.8mm, IPC Low Density"
  rect 1.3x0.7 smd: 1(-1.2,0.95) 2(-1.2,0) 3(-1.2,-0.95) 4(1.2,-0.95) 5(1.2,0.95)
  silkscreen extent -1.32,-1.5 0.15,1.97, body extent -0.87,-1.5 0.87,1.5, height 1.45
SOT95P280X125-6N [mm] "SOT23, 6-Leads, Body 2,92x2,80mm, Pitch 0,95mm, IPC Medium Density"
  rect 1x0.6 smd: 1(-1.35,0.95) 2(-1.35,0) 3(-1.35,-0.95) 4(1.35,-0.95) 5(1.35,0) 6(1.35,0.95)
  silkscreen extent -1.48,-1.5 0.45,1.92, body extent -1.4,-1.45 1.4,1.45, height 1.46
TSSOP8_3P1X3P1_NXP-M [mil]
  rect 77x20 smd paste+0 mask+0: 1(-84,39) 2(-84,13) 3(-84,-13) 4(-84,-39) 5(84,-39) 6(84,-13) 7(84,13) 8(84,39)
  silkscreen extent -94,-66 66,83, body extent -101,-61 101,61, height 43

## Part data
B1 B2 B3 B4 B5 B6: "Basic SMD button", Manufacturer="XKB Connectivity", Datasheet=https://datasheet.lcsc.com/lcsc/2110151730_XKB-Connectivity-TS-1109S-C-A_C397346.pdf, Manufacturer Part Number=TS-1109S-C-A
C1 C2 C3 C4 C5 C6 C7 C8 C9 C10 C11 C12 C13 C14 C15 C16 C17 C18 C19 C20 C21: library part CAP_0603_10V, "Capacitor SMD 0603 10V"
D1: library part CMP-07401-000007-1, "TVS DIODE 5V 15V SOT23-6", Breakdown Voltage=6V, Clamping Voltage=15V, Manufacturer="Bourns Inc.", Max Junction Temp=+150°C, Peak Pulse Current=30A, Peak Pulse Power=500W, Reverse Standoff Voltage=5V, Temperature="-55°C to +150°C", Temperature Range Low=-55°C, Automotive=No, Category=Diode, ComponentLink2Description=Datasheet, ComponentLink2URL=https://www.bourns.com/docs/Product-Datasheets/CDSOT23-SRV05-4.pdf, Device Class L1="Circuit Protection", Device Class L2="TVS Diodes", Device Class L3=unset, Digikey Description="TVS DIODE 5V 15V SOT23-6", Direction=Bidirectional, Height=1.45mm, Ipc Land Pattern Name=SOT95P280X118-6, Lead Free=Yes, Manufacturer Part Number=CDSOT23-SRV05-4, Mouser Description="CDSOT23-SRV05-4, Quad Uni-Directional TVS Diode, 500W, 6-Pin SOT-23", Number Of Channels=4, Octopart=https://octopart.com/cdsot23-srv05-4-bourns-1679449, Package=CDSOT23-SRV05-4, RoHS=TRUE, Standoff Height=0.2mm, Temperature Range High=+150°C
D2 D4: library part LED_0603_RED, "LED 0603 RED SMD"
D3: library part LED_0603_GREEN, "LED 0603 GREEN SMD"
D5: library part D_TVS_0603, "Diode TVS / ESD 0603"
F1: library part FUSE_0603, "Fuse SMD 0603", Manufacturer=AEM, Datasheet=https://datasheet.lcsc.com/lcsc/1811151158_AEM-T0603HI2000TM_C311070.pdf, Manufacturer Part Number=T0603HI2000TM
IC1: "USB to UART integrated circuit", Manufacturer=WCH, Datasheet=https://datasheet.lcsc.com/lcsc/2202231130_WCH-Jiangsu-Qin-Heng-CH340N_C2977777.pdf, Manufacturer Part Number=CH340N
IC2: "Integrated Circuit, charging circuit", Manufacturer=Shouding, Manufacturer Part Number=SD8067C
J1: "Connector", Manufacturer_Name="Shou Han", Datasheet Link=https://datasheet.lcsc.com/szlcsc/1912111437_SHOU-HAN-MicroXNJ_C404969.pdf, Height=2.425mm, Manufacturer_Part_Number=MICROXNJ
L1: library part IND_1210, "Inductor SMD 1210"
P1 P3 P5 P6 P7: library part "Header 4", "Header, 4-Pin", LatestRevisionDate=17-Jul-2002, LatestRevisionNote="Re-released for DXP Platform.", Publisher="Altium Limited"
P2: library part MHDR1X8, "Header, 8-Pin", LatestRevisionDate=17-Jul-2002, LatestRevisionNote="Re-released for DXP Platform.", Publisher="Altium Limited"
P8: library part "Header 2H", "Header, 2-Pin, Right Angle", LatestRevisionDate=17-Jul-2002, LatestRevisionNote="Re-released for DXP Platform.", Publisher="Altium Limited"
Q1: library part CMP-1258-00133-1, "N-Channel Enhancement Mode Field-Effect Transistor, 20 V, 2.5 A, 3-Pin SOT23, Tape and Reel", Manufacturer="NXP Semiconductors", Channel Type=N, Ciss [typ] (pF)=230, Code_JEDEC=TO-236AB, ComponentLink1Description="Manufacturer URL", ComponentLink1URL=http://www.nxp.com/, ComponentLink2Description=Datasheet, ComponentLink2URL=http://www.nxp.com/documents/data_sheet/SI2302DS.pdf, ComponentLink3Description="Package Specification", ComponentLink3URL=http://www.nxp.com/documents/outline_drawing/sot023_po.pdf, Coss [typ] (pF)=125, DatasheetVersion="Rev. 02", ID [max] (A)=2.5, Mounting Technology="Surface Mount", PackageDescription="3-Pin Small Outline Transistor Package, Body 2.9 x 1.3 mm, Pitch 0.95 mm", PackageReference=SOT23, PackageVersion="06-03-16, 03/2006", Packing="Tape & Reel", PartNumber=SI2302DS,215, VDS [max] (V)=20
R1 R2 R3 R4 R5 R6 R7 R8 R9 R10 R11 R12 R13 R14 R15 R16 R17 R18 R19 R20 R21 R22 R23: library part RES_0603, "Resistor SMD 0603"
U1: library part CMP-12105-000143-1, "IC MCU 32BIT 128KB FLASH 64LQFP", RoHS Compliant=Yes
U2: "No Description Available", Mfr_Name=NXP, Copyright="Copyright (C) 2022 Ultra Librarian. All rights reserved.", Manufacturer_Part_Number=LM75BDP, RefDes=RefDes, Type=DEV
U3: library part CMP-04918-000638-1, "FINISH GOODS FOR TPS61023", Datasheet=https://www.ti.com/lit/ds/symlink/tps61023.pdf?ts=1666270495788&ref_url=https%253A%252F%252Fwww.ti.com%252Fproduct%252FTPS61023%253FHQS%253Dti-null-null-verifimanuf_manuf-manu-pf-octopart-wwe
U4: library part CMP-0244-00363-1, "Ultra Low Drop Low Noise BiCMOS 300 mA Voltage Regulator for use with Very Low ESR Output Capacitor, 3.3V, 5-Pin SOT-23, Tape and Reel", ComponentLink1Description="Manufacturer URL", ComponentLink1URL=http://www.st.com, ComponentLink2Description=Datasheet, ComponentLink2URL=http://www.st.com/internet/com/TECHNICAL_RESOURCES/TECHNICAL_LITERATURE/DATASHEET/CD00047465.pdf, DatasheetVersion=1/07/2010, PackageDescription="5-Pin SOT-23 Package, 2.9 x 1.6 mm Body, 0.95 mm Pitch, 2.8 mm Lead Span", PackageReference=SOT23-5L, PackageVersion=1/01/2008
Y1: "Crystal or Oscillator", Manufacturer_Name="Seiko Instruments Inc.", Datasheet Link=https://datasheet.lcsc.com/szlcsc/1901081604_Seiko-Epson-Q13FC1350000400_C32346.pdf, Height=0.9mm, Manufacturer_Part_Number=Q13FC1350000400

## Via types
v1: diameter 0.45, hole 0.2, L1 (Signal) to L4 (Signal), tented both sides, 84 vias
v2: diameter 0.7, hole 0.3, L1 (Signal) to L4 (Signal), tented both sides, 75 vias

## Nets (pads, with @x,y where several pads share a name; then routed paths per layer and width w, separated by ;. In a path a pad name is that pad's centre, name@x,y a point inside that pad or via, vN(x,y) a via of type N, cw(c..) or ccw(c..) an arc to the next point about the centre after c; other vN are vias at no path point)
+3V3: C1.2 C2.2 C3.2 C4.2 C13.2 C19.2 C20.2 IC1.5 IC1.8 P2.1 P3.4 P6.2 P7.4 R1.2 R2.2 R3.2 R4.2 R5.2 R6.2 R7.1 R8.1 R14.1 U1.6 U1.7 U1.8 U2.8 U4.5 | length 23.2
  L1 (Signal) w0.254: 90.678,78.867 91.286,78.867 U1.8 ; U1.8@91.759,78.867 U1.7 U1.6
  L1 (Signal) w0.3: 90.424,78.867 90.678,78.867
  L1 (Signal) w0.4: 90.2,78.867 90.424,78.867 ; 109.771,79.53 U2.8
  L1 (Signal) w0.5: v2(80.5,98.3) R14.1 ; C1.2@82.109,78.267 C1.2 C2.2 ; R6.2 83.317,67.2 v2@84.2,67.2 ; C2.2@84.38,78.267 C2.2 ; C3.2@86.651,78.267 C3.2 ; IC1.8 88.355,56.388 ccw(c88.355,56.888) 88.381,56.389 v2(88.6,56.4) ; C4.2@88.921,78.267 C4.2 ; 90.2,78.867 ccw(c90.2,78.194) 89.724,78.67 C4.2 ; v2(91.569,92.333) 92.318,92.333 R1.2 ; v2(97.9,90.934) 98.691,90.143 R2.2 ; R3.2 104.171,90.293 v2(104.171,91.145) ; v2(105.983,72.817) R7.1 ; R8.1 106,77.19 v2(106,76.4) ; v2(109.4,79.2) 109.507,79.275 ccw(c109.219,79.684) v2@109.572,79.33 ; v2@109.4,90.1 110.191,90.1 R4.2 ; v2@109.421,79.179 v2@109.572,79.33 ; 109.771,79.53 v2@109.572,79.33 ; v2(115.304,90.043) R5.2 ; C2.2 C3.2 ; C3.2 C4.2
  other v1: 88.5,61.1 105.3,66.4 105.29,66.962 101.3,67.3 102.4,67.3 103.7,67.3 104.7,67.3 105.3,67.6 103,68.2
  other v2: 86.6,61.2 87.7,61.2 101.5,64.8 103.3,64.8 101.5,66.2 103.3,66.2 84.4,67.2 105.791,68.326 83.495,78.117 85.765,78.117 88.036,78.117 109.323,90.104
+5: C17.2 P1.2 R20.2 U3.6
ADC_FET3: Q1.3 R23.1 | length 3.1
  L1 (Signal) w0.254: R23.1 108.259,56.975 cw(c110.055,55.179) 110.055,57.719 Q1.3
Button0: B1.1 B1.2 C5.1 R5.1 U1.50 | length 32.1
  L1 (Signal) w0.254: U1.50 100.759,84.971 ; 100.759,84.972 cw(c101.471,84.97) 100.965,85.471 102.616,87.122 ; 102.617,87.123 cw(c103.54,86.193) 103.54,87.503 116.713,87.503 ccw(c116.713,88.519) 117.729,88.519 R5.1@117.729,90.043 ; B1.2 B1.1 117.65,92.408 ccw(c117.729,92.408) C5.1 R5.1@117.729,90.043 ; R5.1 R5.1@117.729,90.043
Button1: B3.1 B3.2 C7.1 R4.1 U1.51 | length 26.5
  L1 (Signal) w0.254: U1.51 100.259,85.573 ; 100.259,85.574 cw(c101.382,85.57) 100.584,86.36 102.235,88.011 ; 102.236,88.012 cw(c103.467,86.772) 103.467,88.519 110.871,88.519 ccw(c110.871,89.396) 111.748,89.396 R4.1 111.76,90.043 C7.1 cw(c111.76,92.357) 111.732,92.357 B3.1 B3.2
Button2: B4.1 B4.2 C8.1 R3.1 U1.52 | length 22.9
  L1 (Signal) w0.254: U1.52 99.759,86.428 ; 99.759,86.429 cw(c101.294,86.423) 100.203,87.503 102.383,89.683 ccw(c101.517,90.551) 102.743,90.551 102.743,90.95 cw(c104.122,90.95) 104.122,92.329 C8.1 ; R3.1 ccw(c105.64,90.194) 105.791,90.194 C8.1 ; B4.2 B4.1 ccw(c105.815,94.77) 105.791,94.77 C8.1
Button3: B5.1 B5.2 C9.1 R2.1 U1.53 | length 17.4
  L1 (Signal) w0.254: U1.53 99.259,87.517 cw(c100.327,87.514) 99.568,88.265 99.949,88.646 ccw(c99.355,89.234) 100.191,89.234 R2.1 100.191,92.329 C9.1 100.203,94.488 ccw(c99.897,94.488) B5.1 B5.2
Button4: B6.1 B6.2 C12.1 R1.1 U1.54 | length 20.2
  L1 (Signal) w0.254: B6.2 ccw(c94.009,101.265) 93.968,101.265 R1.1 C12.1 96.335,91.616 96.335,91.614 ccw(c97.843,91.614) 96.775,90.55 98.421,88.904 cw(c97.612,88.091) 98.423,88.902 cw(c97.612,88.091) 98.759,88.09 98.759,84.823 U1.54
ChargingIC_LED_Anodes: D3.A D4.A R18.1 | length 5.2
  L1 (Signal) w0.5: R18.1 D4.A
DFC77_Data: P3.1 U1.63 | length 21.6
  L1 (Signal) w0.254: P3.1 78.831,89.408 cw(c78.831,86.868) 80.627,88.664 81.171,88.12 ccw(c82.967,89.916) 82.967,87.376 88.864,87.376 cw(c88.864,84.836) 90.66,86.632 ccw(c91.22,87.192) 91.22,86.4 92.598,86.4 cw(c92.601,85.627) 93.15,86.171 94.236,85.085 94.236,84.373 U1.63
DFC77_ON_OFF: P3.2 R16.1 U1.64 | length 20.8
  L1 (Signal) w0.254: P3.2 cw(c75.172,86.868) 75.172,87.237 R16.1 78.027,87.237 cw(c78.027,86.909) 78.259,87.141 v1(80.609,84.791)
  L1 (Signal) w0.271: v1(92.1,85.5) 92.4,85.5 cw(c92.4,84.995) 92.757,85.352 ; 92.757,85.352 U1.64
  L4 (Signal) w0.254: v1(80.609,84.791) 89.653,84.791 ccw(c89.653,85.847) 90.4,85.1 cw(c91.366,84.134) 91.366,85.5 v1(92.1,85.5)
GND: B1.3 B1.4 B2.1 B2.2 B3.3 B3.4 B4.3 B4.4 B5.3 B5.4 B6.3 B6.4 C1.1 C2.1 C3.1 C4.1 C5.2 C6.1 C7.2 C8.2 C9.2 C10.1 C11.1 C12.2 C13.1 C14.1 C15.1 C16.1 C17.1 C18.1 C19.1 C20.1 C21.1 D1.2 D2.K D5.2 IC1.3 IC2.2 J1.5 P1.1 P2.2 P3.3 P5.1 P6.1 P7.1 P8.2 Q1.2 R9.2 R11.2 R12.2 R13.2 R15.2 R16.2 R19.2 R21.1 U1.9 U2.4 U3.4 U4.2 | length 69.5
  L1 (Signal) w0.254: 90.9,78.3 cw(c91.021,78.179) 91.021,78.35 U1.9
  L1 (Signal) w0.3: 90.7,78.1 90.9,78.3
  L1 (Signal) w0.4: 90.6,77.6 90.6,77.859 cw(c90.941,77.859) 90.7,78.1 ; U2.4 112.181,76.346 112.235,76.4 v2(112.89,76.4)
  L1 (Signal) w0.5: R16.2 77.49,85.636 cw(c77,85.537) 77.5,85.537 v2(77.5,84.8) ; B2.1 B2.2 ; v2@80.2,67.2 81.021,67.2 C6.1 ; C1.1@82.109,76.467 C1.1 C2.1 ; v2(82.4,83.2) 83.143,83.2 ccw(c83.143,83.7) 83.212,83.205 C11.1 ; v2(82.4,85.8) 83.178,85.8 C10.1 ; C2.1@84.38,76.467 C2.1 ; C13.1 85.4,62.104 v2(85.4,61.3) ; C4.1@88.921,76.467 88.967,76.496 C4.1@89.158,76.617 ; C4.1@88.921,76.617 88.638,76.613 ccw(c88.646,76.113) 88.635,76.613 v2(88,76.6) 87.151,76.6 C3.1 C2.1 ; C4.1 C4.1@89.158,76.617 ; 90.6,77.6 cw(c89.86,77.6) 90.308,77.011 ccw(c90.612,76.614) 90.268,76.977 cw(c89.373,77.91) 89.424,76.618 89.421,76.618 89.174,76.633 C4.1@89.158,76.617 ; v2(91.694,58.928) IC1.3 ; v1(92.71,66.675) IC2.2 v2(94.742,66.675) ; B6.3 v2(96.98,98.044) B6.4 ; C12.2 97.835,92.429 98.5,93.094 v2(98.5,93.1) ; C9.2 101.703,92.429 v2(102.374,93.1) ; B5.3 v2(102.897,98.044) B5.4 ; v2(105.5,84.4) 105.795,83.704 R9.2 ; C8.2 107.291,92.429 v2(107.962,93.1) ; B4.3 v2(108.815,98.044) B4.4 ; R11.2 v2(109.093,85.979) ; R12.2 v2(111.506,85.979) ; v2(112.89,76.4) v2@112.9,76.4 ; C7.2 113.26,92.429 v2(113.931,93.1) ; R13.2 v2(113.792,85.979) ; B3.3 v2(114.732,98.044) B3.4 ; D2.K 116.342,80.933 cw(c116.695,80.579) 116.68,81.079 v2(117.4,81.1) ; C5.2 v2(120.13,92.329) ; B1.3 v2(120.65,98.044) B1.4
  other v1: 81.6,55.8 82.2,55.8 82.8,56.2 82.8,56.8 82.8,57.4 82.5,58.1 83.2,58.1 94.5,58.2 114.1,58.3 79.1,58.5 76.1,58.6 76.7,58.6 111.5,58.7 94.5,58.8 95.1,58.8 114.1,59 101.9,59.5 102.9,59.5 112.5,59.5 113.3,59.5 111.8,60 114,60 111.8,60.8 114,60.8 114.432,63.695 107.126,65.732 107.126,66.588 107.131,67.508 97.9,67.8 100,67.8 97.9,68.5 100,68.5 100,69.2 97.3,69.3 97.9,69.3 94.7,69.5 97.3,69.9 94.7,70.1 96.2,70.5 96.8,70.5 101.2,70.6 102.5,70.6 103.5,70.6 104.8,70.6 94.7,70.7 111.7,70.9 89,71.2 107.7,71.7 108.7,71.7 109.9,71.7 111,71.7 111.7,71.9
  other v2: 108.1,55 112.8,55 76.7,55.8 79,55.8 96.1,57.2 100,57.2 103.9,57.2 117,57.2 120,57.2 114.9,59.5 110.8,59.6 120.6,61.2 120.6,63.1 113.665,63.754 115.189,63.754 120.6,64.8 80,67.2 105.8,69.5 106.9,69.5 88.2,71.3 91.14,71.3 94.08,71.3 97.02,71.3 99.96,71.3 102.9,71.3 108.2,73.3 110.6,73.3 112.5,73.3 81,73.9 83.6,76.6 85.9,76.6
LDS3985M33R_BYP: C21.2 U4.4 | length 2.4
  L1 (Signal) w0.254: U4.4 ccw(c108.072,67.061) 108.204,67.061 C21.2
LED: R17.2 U1.47 | length 16.9
  L1 (Signal) w0.254: U1.47 103.821,81.85 ccw(c103.821,82.55) 104.521,82.55 v1(104.521,83.693) ; v1(115.316,86.36) 116.168,86.348 R17.2
  L4 (Signal) w0.254: v1(104.521,83.693) 104.521,84.471 cw(c106.933,84.471) 106.933,86.883 113.902,86.883 cw(c113.904,85.964) 114.555,86.613 ; 114.555,86.613 ccw(c115.167,87.227) 115.167,86.36 v1(115.316,86.36)
LiPoOutput+: C16.2 C18.2 F1.2 L1.1 P8.1 R22.2 U3.2 U3.3 U4.1 U4.3
LM75BDP_A0: R11.1 U2.7 | length 4.9
  L1 (Signal) w0.254: R11.1 109.093,82.296 ccw(c109.855,82.296) 109.855,81.534 110.363,81.534 cw(c110.363,81.026) 110.871,81.026 110.871,79.958 U2.7
LM75BDP_A1: R12.1 U2.6 | length 3.8
  L1 (Signal) w0.254: R12.1@111.177,83.59 cw(c111.177,83.247) 111.52,83.247 U2.6
LM75BDP_A2: R13.1 U2.5 | length 4.7
  L1 (Signal) w0.254: U2.5 ccw(c112.181,79.998) 112.221,79.998 112.221,81.064 cw(c112.691,81.064) 112.691,81.534 113.157,81.534 ccw(c113.157,82.169) 113.792,82.169 R13.1@113.792,83.566
MCU_ADC: R22.1 R23.2 U1.29 | length 24.1
  L1 (Signal) w0.254: v1(99.5,74.041) 99.6,73.941 cw(c99.217,73.558) 99.759,73.558 U1.29 ; v1(106.9,59.3) cw(c106.936,59.264) 106.936,59.315 108.077,59.315 ; R23.2 108.077,59.315 ; R22.1 108.077,59.315
  L4 (Signal) w0.254: v1(99.5,74.041) 99.344,73.885 ccw(c101.14,72.089) 98.6,72.089 98.6,66.252 ccw(c101.14,66.252) 99.344,64.456 103.756,60.044 ccw(c105.552,61.84) 105.552,59.3 v1(106.9,59.3)
MCU_ADC_Controll: Q1.1 U1.30 | length 28.3
  L1 (Signal) w0.254: U1.30 100.259,73.601 cw(c100.739,73.601) 100.4,73.941 v1(100.5,74.041) ; Q1.1 v1(114.125,56.769)
  L4 (Signal) w0.254: v1(100.5,74.041) 102.707,74.041 cw(c102.707,71.501) 104.503,73.297 105.33,72.47 cw(c105.151,72.29) 105.365,72.426 ccw(c105.983,72.817) 105.592,72.199 cw(c105.456,71.985) 105.636,72.164 108.764,69.036 cw(c107.227,67.5) 109.4,67.5 109.4,60.352 ccw(c111.94,60.352) 110.144,58.556 111.187,57.513 ccw(c112.983,59.309) 112.983,56.769 v1(114.125,56.769)
MCU_I2C1_SCL: P1.4 P6.4 R7.2 U1.37 U2.1 | length 57
  L1 (Signal) w0.254: U1.37 103.87,76.85 cw(c103.871,75.931) 104.522,76.58 105.7,75.402 cw(c105.52,75.222) R7.2@105.702,75.4 ; R7.2@105.703,75.399 ccw(c105.983,75.682) R7.2 106.01,75.311 v1(108.458,75.311) 110.072,75.311 110.199,75.438 U2.1 ; v1(116.84,75.311) ccw(c116.84,77.457) 118.358,75.94 P1.4
  L4 (Signal) w0.254: P6.4 80.899,70.104 ccw(c80.899,71.628) 82.423,71.628 82.423,72.106 cw(c84.817,72.106) 84.817,74.5 88.233,74.5 ccw(c88.234,75.866) 89.2,74.9 cw(c90.192,73.908) 90.192,75.311 92.5,75.311 v1(108.458,75.311) v1(116.84,75.311)
MCU_I2C1_SDA: P1.3 P6.3 R8.2 U1.42 U2.2 | length 59.1
  L1 (Signal) w0.254: U1.42 105.131,79.35 cw(c105.131,78.84) 105.612,79.008 ccw(c105.852,79.094) 105.85,78.84 R8.2 cw(c105.983,77.52) 106.916,78.454 107.72,77.649 ccw(c108.458,78.385) v1(108.458,77.343) 109.877,77.343 cw(c109.877,76.476) 110.49,77.089 110.637,76.942 ccw(c110.816,77.122) 110.656,76.925 cw(c110.453,76.668) 110.78,76.68 ccw(c111.034,76.691) 110.781,76.671 110.784,76.632 cw(c110.531,76.612) 110.785,76.612 110.785,76.541 U2.2 U2.2@110.871,75.69
  L4 (Signal) w0.254: P6.3 78.613,72.644 ccw(c78.613,73.787) 79.756,73.787 79.756,74.803 cw(c82.296,74.803) 82.296,77.343 83.566,77.343 v1(108.458,77.343) 116.931,77.343 cw(c116.931,74.803) 118.727,76.599 P1.3 P1.3@119.888,75.184
MCU_NRST: B2.3 B2.4 C6.2 P5.2 R6.1 U1.12 | length 55.4
  L1 (Signal) w0.254: B2.3 ccw(c79.131,70.89) 78.981,70.74 C6.2 R6.1 85.357,70.74 ccw(c85.207,70.89) B2.4 ; B2.4@85.419,70.895 85.992,71.313 85.873,71.313 cw(c86.114,71.23) 85.933,71.409 86.32,71.796 cw(c90.193,67.923) 86.393,71.868 cw(c90.193,67.923) 90.193,73.401 91.181,73.401 ccw(c91.181,75.24) 92.478,73.936 ; U1.12@91.286,76.832 U1.12 ; U1.12@91.762,76.871 ccw(c91.955,78.076) 92.141,76.87 92.232,76.873 92.745,76.873 cw(c92.745,76.743) 92.837,76.835 ; 92.478,73.936 ccw(c91.611,74.803) 92.837,74.803 92.837,76.835 ; v1@93.377,78.644 ccw(c93.125,78.612) 93.352,78.726 v1(93.345,78.74) ccw(c94.571,77.514) 92.837,77.514 92.837,76.835
  L4 (Signal) w0.254: v1(93.345,78.74) 103.378,78.74 ccw(c103.378,81.28) 105.918,81.28 105.918,82.677 cw(c108.458,82.677) 108.458,85.217 118.491,85.217 ccw(c118.491,86.868) P5.2
MCU_OSC32_IN: C10.2 U1.4 Y1.2 | length 10.9
  L1 (Signal) w0.254: C10.2 87.836,85.761 cw(c87.836,85.721) Y1.2@87.876,85.725 ; Y1.2 Y1.2@87.876,85.725 ; 90.297,82.042 ccw(c91.648,82.042) 90.691,81.088 cw(c90.511,80.909) 90.695,81.085 ccw(c91.43,81.781) 90.932,80.899 cw(c90.809,80.677) 90.947,80.89 ccw(c91.084,81.104) 91.083,80.85 U1.4 ; 90.297,82.043 90.297,84.731 ccw(c89.43,84.731) 90.043,85.344 89.842,85.545 ccw(c89.408,85.112) 89.408,85.725 Y1.2@87.876,85.725
MCU_OSC32_OUT: R10.1 U1.5 | length 2.5
  L1 (Signal) w0.254: R10.1 89.323,80.35 U1.5
MCU_SPI1_CLK: P2.5 U1.57 | length 22.3
  L1 (Signal) w0.254: v1@97.134,87.375 cw(c96.935,87.218) v1@97.15,87.352 ; v1(97.151,87.351) cw(c96.527,86.969) 97.259,86.972 ; U1.57 97.259,86.971
  L4 (Signal) w0.254: P2.5 85.344,99.096 ccw(c89.724,99.096) 86.626,96 86.627,95.999 ; 86.628,95.998 94.023,88.603 ccw(c97.046,91.626) v1@97.151,87.352
MCU_SPI1_MISO: P2.7 U1.55 | length 20.7
  L1 (Signal) w0.254: v1(96.53,89.789) 97.93,88.389 cw(c97.122,87.589) 98.259,87.592 U1.55
  L4 (Signal) w0.254: P2.7 ccw(c90.03,100.965) 88.513,99.447 95.786,92.174 cw(c93.99,90.378) 96.53,90.378 v1(96.53,89.789)
MCU_SPI1_MOSI: P2.6 U1.56 | length 21.1
  L1 (Signal) w0.254: v1(96.647,88.773) 97.533,87.887 97.534,87.886 cw(c96.988,87.342) 97.759,87.345 ; U1.56 97.759,87.344
  L4 (Signal) w0.254: P2.6 86.614,99.858 ccw(c89.154,99.858) 87.358,98.062 v1(96.647,88.773)
MCU_SWCLK: P5.3 R9.1 U1.46 | length 18.4
  L1 (Signal) w0.254: U1.46 104.486,81.35 ccw(c104.486,81.604) 104.665,81.424 105.156,81.915 cw(c105.492,81.579) 105.492,82.054 R9.1 106.692,82.054 ccw(c106.692,82.423) v1(107.061,82.423)
  L4 (Signal) w0.254: v1(107.061,82.423) cw(c108.966,82.423) 108.966,84.328 P5.3
MCU_SWDIO: P5.4 U1.45 | length 17.6
  L1 (Signal) w0.254: U1.45 104.188,80.85 cw(c104.19,80.24) 104.623,80.67 104.848,80.445 ccw(c105.287,80.887) 105.283,80.264 v1(107.315,80.264)
  L4 (Signal) w0.254: v1(107.315,80.264) 117.9,80.264 ccw(c117.9,81.997) 119.126,80.772 P5.4
NRF_CE: P2.3 R14.2 U1.59 | length 25
  L1 (Signal) w0.254: P2.3 cw(c82.804,100.85) 82.919,100.85 R14.2 82.919,95.425 ccw(c85.459,95.425) 83.663,93.629 85.87,91.422 ccw(c87.666,93.218) 87.666,90.678 90.976,90.678 cw(c90.976,88.024) 92.854,89.899 94.577,88.176 96.066,86.687 ; U1.59 96.259,86.225 ccw(c95.605,86.223) 96.067,86.686 ; 96.066,86.687 96.067,86.686
NRF_CSN: P2.4 U1.58 | length 23.6
  L1 (Signal) w0.254: P2.4 84.074,97.064 ccw(c86.614,97.064) 84.818,95.268 87.775,92.311 ccw(c89.571,94.107) 89.571,91.567 90.896,91.567 cw(c90.896,88.414) 93.124,90.645 cw(c90.896,88.414) 93.126,90.643 96.374,87.395 cw(c95.448,86.467) 96.759,86.471 U1.58
NRF_IRQ: P2.8 U1.62 | length 38.2
  L1 (Signal) w0.254: v1(91.948,87.249) 92.61,87.249 cw(c92.61,86.67) 93.019,87.08 94.638,85.46 cw(c94.35,85.17) 94.759,85.17 U1.62
  L4 (Signal) w0.254: P2.8 P2.8@89.154,101.039 ; P2.8@89.154,101.04 ccw(c88.9,101.039) 89.08,101.218 87.772,102.527 ccw(c87.593,102.346) 87.593,102.6 79.2,102.6 ccw(c79.2,101.4) 78,101.4 78,99.952 ccw(c80.54,99.952) 78.744,98.156 88.907,87.993 ccw(c90.703,89.789) 90.703,87.249 v1(91.948,87.249)
Redled_Anode: D2.A R17.1 | length 2.4
  L1 (Signal) w0.254: D2.A R17.1
SD8067C_BAT: C15.2 D5.1 F1.1 IC2.3
SD8067C_CHRG: D4.K IC2.1 | length 1.9
  L1 (Signal) w0.5: IC2.1 cw(c93.693,65.612) 93.853,65.612 D4.K
SD8067C_PROG: IC2.6 R19.1 | length 4.7
  L1 (Signal) w0.254: IC2.6 ccw(c91.106,66.691) 91.789,66.008 ccw(c91.098,66.699) 92.075,66.699 92.075,69.514 cw(c92.55,69.514) R19.1
SD8067C_STDBY: D3.K IC2.5 | length 5.3
  L1 (Signal) w0.5: IC2.5 90.096,66.675 ccw(c90.096,66.241) 89.789,66.548 89.789,64.188 ccw(c90.223,64.188) 89.916,63.881 ccw(c89.945,63.91) 89.945,63.869 D3.K
TPS61023DRLR_FB: R20.1 R21.2 U3.1 | length 5
  L1 (Signal) w0.254: R21.2 cw(c110.49,67.016) 112.045,68.571 112.671,67.945 U3.1 U3.1@112.661,65.524
TPS61023DRLR_SW: L1.2 U3.5
UART1_RXD: P7.2 U1.61 | length 25.7
  L1 (Signal) w0.254: P7.2 75.529,95.885 cw(c75.529,93.345) 77.325,95.141 83.203,89.263 ccw(c84.999,91.059) 84.999,88.519 91.404,88.519 cw(c91.404,85.979) 93.2,87.775 94.995,85.98 cw(c94.355,85.341) 95.259,85.344 95.259,85.342 U1.61
UART1_TXD: P7.3 U1.60 | length 27.5
  L1 (Signal) w0.254: P7.3 75.402,98.425 cw(c75.402,95.578) 77.415,97.591 84.704,90.302 ccw(c86.242,91.831) 86.247,89.662 ; 86.248,89.662 91.302,89.662 ; 91.304,89.662 cw(c91.304,87.494) 92.838,89.026 95.577,86.287 cw(c95.398,86.107) 95.579,86.285 cw(c95.139,85.848) 95.759,85.85 U1.60
UART2_RXD: IC1.6 U1.20 | length 22.4
  L1 (Signal) w0.254: IC1.6 87.848,58.928 ccw(c87.848,61.468) 89.644,59.672 90.139,60.167 cw(c91.44,58.866) v1(91.44,60.706) ; U1.20 95.259,73.515 cw(c95.937,73.515) 95.458,73.995 v1(95.504,74.041) v1@95.504,73.949
  L4 (Signal) w0.254: v1(91.44,60.706) 92.964,60.706 ccw(c92.964,63.246) 95.504,63.246 v1(95.504,74.041)
UART2_TXD: IC1.7 U1.19 | length 23.9
  L1 (Signal) w0.254: IC1.7 v1(89.662,57.658) ; v1@94.488,73.943 v1(94.488,74.041) 94.579,73.95 cw(c94.146,73.516) 94.759,73.516 U1.19
  L4 (Signal) w0.254: v1(89.662,57.658) 89.662,71.501 cw(c92.202,71.501) 92.202,74.041 v1(94.488,74.041)
USB_D_N: D1.4 D1.6 IC1.2 J1.2 | length 23.4
  L1 (Signal) w0.271: J1.2 78.366,60.529 81.8,60.529 ; D1.6 81.854,60.583 81.8,60.529 ; D1.4 83.754,60.583 83.7,60.529 ; IC1.2@92.964,57.785 IC1.2@93.07,57.785 ; IC1.2 92.71,57.658 ccw(c92.71,56.007) 91.059,56.007 91.059,55.626 cw(c90.551,55.626) 90.551,55.118 86.453,55.118 cw(c86.453,56.134) 85.437,56.134 85.437,59.296 ccw(c84.204,59.296) 84.204,60.529 83.7,60.529 ; 81.8,60.529 83.7,60.529
USB_D_P: D1.1 D1.3 IC1.1 J1.3 | length 22.8
  L1 (Signal) w0.271: J1.3 78.366,60.008 81.9,60.008 ; D1.1 ccw(c81.854,59.171) 81.9,59.171 81.9,60.008 ; D1.3@83.754,59.387 D1.3 83.7,59.179 83.7,60.008 ; IC1.1 91.914,56.388 ccw(c91.914,56.007) 91.533,56.007 91.533,55.626 cw(c90.551,55.626) 90.551,54.644 86.453,54.644 cw(c86.453,56.134) 84.963,56.134 84.963,59.1 ccw(c84.055,59.1) 84.055,60.008 83.7,60.008 ; 81.9,60.008 83.7,60.008
USB_ID: J1.4 R15.1 | length 4.3
  L1 (Signal) w0.254: J1.4 79.009,59.294 cw(c79.009,58.039) 80.264,58.039 80.264,56.92 ccw(c80.288,56.92) R15.1
VCC: C14.2 D1.5 IC2.4 J1.1 R18.2
XTRAL_IN: C11.2 R10.2 Y1.1 | length 6
  L1 (Signal) w0.254: C11.2 Y1.1 87.773,83.118 R10.2
pads on no net: IC1.4 J1.MH1 J1.MH2 J1.MH3 J1.MH4 U1.1 U1.2 U1.3 U1.10 U1.11 U1.13 U1.14 U1.15 U1.16 U1.17 U1.18 U1.21 U1.22 U1.23 U1.24 U1.25 U1.26 U1.27 U1.28 U1.31 U1.32 U1.33 U1.34 U1.35 U1.36 U1.38 U1.39 U1.40 U1.41 U1.43 U1.44 U1.48 U1.49 U2.3

## Polygon pours and split planes (outlines as drawn)
+3V3 on L1 (Signal) "+3V3_L01_P014" (solid, pour order 14): 86.1,62.7 cw(c86.5,62.7) 86.5,63.1 87.5,63.1 cw(c87.5,62.8) 87.8,62.8 87.8,61.907 ccw(c88.239,61.907) 88.239,61.468 88.595,61.468 cw(c88.595,61.163) 88.9,61.163 88.9,59.893 cw(c88.697,59.893) 88.697,59.69 86.61,59.69 cw(c86.61,60.2) 86.1,60.2
GND on L1 (Signal) "GND_L01_P009" (solid, pour order 9): 83.439,58.293 83.82,58.293 cw(c83.82,58.039) 84.074,58.039 84.074,54.864 cw(c83.566,54.864) 83.566,54.356 77.982,54.356 cw(c77.982,56.646) 75.692,56.646 75.692,58.419 cw(c76.201,58.419) 76.201,58.928 78.744,58.928 cw(c78.744,58.027) 79.645,58.027 79.645,56.142 81.152,56.142 81.153,57.65 81.153,58.191 cw(c81.255,58.191) 81.255,58.293 82.295,58.293 ccw(c82.295,58.371) 82.373,58.371 82.368,59.593 cw(c82.465,59.593) 82.465,59.69 83.185,59.69 cw(c83.185,59.563) 83.312,59.563 83.312,58.42 ccw(c83.439,58.42)
VCC on L1 (Signal) "VCC_L01_P010" (solid, pour order 10): 85.173,63.373 ccw(c85.173,62.8) 84.6,62.8 cw(c84.039,62.8) 84.039,62.239 83.877,62.23 83.185,62.23 83.185,60.96 82.423,60.96 82.423,62.23 80.01,62.23 ccw(c80.01,61.849) 79.629,61.849 cw(c78.74,61.849) 78.74,60.96 76.454,60.96 cw(c76.454,61.722) 75.692,61.722 75.692,63.26 cw(c78.232,63.26) 78.232,65.8 84.85,65.8 ccw(c84.85,66.675) 85.725,66.675 85.725,68.072 cw(c86.868,68.072) 86.868,69.215 91.059,69.215 cw(c91.059,68.58) 91.694,68.58 91.694,67.183 89.535,67.183 ccw(c89.535,66.929) 89.281,66.929 89.281,63.373
GND on L1 (Signal) "GND_L01_P005" (solid, pour order 5): 106.78,66.027 106.664,66.027 106.645,63.711 106.645,63.719 107.592,63.719 107.596,65.442 107.592,66.027 107.468,66.025 107.463,67.292 107.45,68.544 107.45,69.275 107.45,70.089 cw(c107.465,70.089) 107.465,70.104 112.903,70.104 ccw(c112.903,70.358) 113.157,70.358 113.157,73.533 ccw(c112.903,73.533) 112.903,73.787 107.696,73.787 ccw(c107.695,73.407) 107.315,73.406 107.315,73.025 cw(c105.855,73.215) 105.664,71.755 88.392,71.755 ccw(c88.392,70.993) 87.63,70.993 87.63,69.977 ccw(c88.011,69.977) 88.011,69.596 91.211,69.596 ccw(c91.211,69.794) 91.409,69.794 91.409,70.515 cw(c91.536,70.485) 91.542,70.615 ccw(c91.725,72.441) 91.757,70.607 91.895,70.609 ccw(c91.886,71.179) 91.904,70.609 cw(c91.93,69.822) 91.996,70.607 ccw(c92.039,71.667) 92.075,70.607 ccw(c92.117,71.467) 92.14,70.606 ccw(c92.197,71.537) 92.278,70.608 cw(c92.329,70.032) 92.38,70.608 ccw(c92.466,71.599) 92.528,70.606 ccw(c92.593,71.877) 92.658,70.606 ccw(c92.687,71.177) 92.716,70.606 ccw(c92.776,71.784) 92.837,70.606 ccw(c92.872,71.295) 92.908,70.606 ccw(c92.969,71.52) 93.044,70.607 cw(c93.045,70.561) 93.091,70.563 93.102,70.496 ccw(c95.639,68.17) 93.091,70.484 93.069,70.376 cw(c87.427,65.758) 93.091,70.349 93.091,68.961 ccw(c93.218,68.961) 93.218,68.834 95.25,68.834 cw(c95.253,68.604) 95.302,68.829 95.885,68.834 97.165,68.834 cw(c97.166,68.495) 97.425,68.714 cw(c97,68.353) 97.555,68.304 ccw(c102.971,68.07) 97.555,67.835 97.555,67.564 ccw(c97.673,67.554) 97.663,67.437 100.33,67.437 ccw(c100.33,67.564) 100.457,67.564 100.457,68.834 cw(c100.584,68.834) 100.584,68.961 106.553,68.961 cw(c106.553,68.717) 106.797,68.709
TPS61023DRLR_SW on L1 (Signal) "TPS61023DRLR_SW_L01_P002" (solid, pour order 2): 118.364,65.114 119.036,65.114 cw(c119.036,64.897) 119.253,64.897 119.253,63.5 cw(c118.999,63.5) 118.999,63.246 117.538,63.246 116.332,63.246 cw(c116.332,63.524) 116.054,63.524 116.054,63.567 ccw(c114.758,63.621) 114.803,64.917 113.824,64.917 113.824,65.114
GND on L1 (Signal) "GND_L01_P008" (solid, pour order 8): 94.234,55.499 94.234,55.118 ccw(c94.996,55.118) 94.996,54.356 120.904,54.356 ccw(c120.904,54.955) 121.503,54.955 121.503,70.91 ccw(c121.166,70.91) 121.166,71.247 ccw(c121.16,70.999) 121.158,71.247 119.179,71.247 ccw(c119.178,70.814) 118.872,71.12 ccw(c119.178,70.814) 118.745,70.813 118.745,65.839 ccw(c119.179,65.839) 118.872,65.532 ccw(c119.179,65.839) 119.179,65.405 cw(c119.179,65.077) 119.507,65.077 119.507,60.701 cw(c119.128,60.704) 119.126,60.325 115.115,60.325 cw(c115.115,60.759) 114.808,60.452 cw(c115.114,60.759) 114.681,60.759 114.681,60.96 ccw(c114.554,60.96) 114.554,61.087 110.617,61.087 ccw(c110.617,60.579) 110.109,60.579 110.109,58.801 ccw(c110.617,58.801) 110.617,58.293 111.707,58.293 cw(c111.707,58.076) 111.924,58.076 ccw(c112.014,58.166) 112.014,58.039 115.062,58.039 cw(c115.062,57.785) 115.316,57.785 115.316,56.007 cw(c115.062,56.007) 115.062,55.753 106.172,55.753 cw(c106.172,56.261) 105.664,56.261 105.664,60.452 ccw(c105.029,60.452) 105.029,61.087 100.446,61.087 cw(c100.446,61.469) 100.063,61.469 100.063,61.608 ccw(c99.822,61.608) 99.822,61.849 98.933,61.849 97.81,61.856 ccw(c97.808,61.562) 97.513,61.563 97.513,59.423 cw(c97.145,59.423) 97.145,59.055 96.647,59.055 94.742,59.055 93.996,59.058 ccw(c93.745,59.058) 93.745,59.309 93.726,59.309 92.434,59.309 cw(c91.888,60.285) 92.278,59.237 92.278,58.598 ccw(c92.329,58.598) 92.329,58.547 93.541,58.547 93.731,58.547 ccw(c93.731,58.809) 93.993,58.801 94.16,58.801 cw(c94.16,58.727) 94.234,58.727 94.234,58.569
LiPoOutput+ on L1 (Signal) "LIPOOUTPUT+_L01_P004" (solid, pour order 4): 113.03,65.103 ccw(c112.974,65.103) 112.974,65.159 107.817,65.159 ccw(c107.817,64.963) 107.621,64.963 107.619,64.707 107.619,63.784 cw(c107.527,63.784) 107.527,63.692 106.7,63.692 cw(c106.7,63.77) 106.622,63.77 106.622,65.291 105.042,65.291 ccw(c105.042,65.151) 104.902,65.151 104.902,64.262 cw(c104.648,64.262) 104.648,64.008 95.504,64.008 ccw(c95.481,63.702) 95.479,64.009 95.378,64.009 ccw(c95.378,63.5) 94.869,63.5 94.869,59.436 ccw(c94.996,59.436) 94.996,59.309 96.941,59.309 ccw(c96.941,59.652) 97.284,59.652 97.284,61.872 cw(c97.512,61.873) 97.511,62.101 98.356,62.103 100.013,62.103 cw(c100.013,61.786) 100.33,61.785 100.33,61.595 ccw(c100.584,61.595) 100.584,61.341 114.554,61.341 cw(c114.554,60.96) 114.935,60.96 ccw(c115.316,60.96) 115.316,60.579 119.126,60.579 ccw(c119.126,60.706) 119.253,60.706 119.253,62.738 ccw(c118.999,62.738) 118.999,62.992 113.487,62.992 cw(c113.493,63.455) 113.03,63.449
SD8067C_BAT on L1 (Signal) "SD8067C_BAT_L01_P007" (solid, pour order 7): 97.041,68.453 cw(c97.041,68.206) 97.288,68.206 97.288,67.553 ccw(c97.663,67.553) 97.663,67.178 100.342,67.178 cw(c100.344,67.065) 100.457,67.068 cw(c100.074,67.056) 100.457,67.056 100.457,64.643 cw(c100.076,64.643) 100.076,64.262 95.631,64.262 cw(c95.697,64.577) 95.382,64.643 95.382,66.553 ccw(c94.742,66.68) 94.615,67.319 93.218,67.319 93.218,67.945 cw(c93.726,67.945) 93.726,68.453
+3V3 on L1 (Signal) "+3V3_L01_P006" (solid, pour order 6): 100.838,68.707 ccw(c100.838,68.58) 100.711,68.58 100.711,64.643 ccw(c101.092,64.643) 101.092,64.262 104.394,64.262 ccw(c104.394,64.516) 104.648,64.516 104.648,65.659 cw(c105.029,65.659) 105.029,66.04 106.553,66.04 ccw(c106.553,66.294) 106.807,66.294 106.807,68.453 ccw(c106.553,68.453) 106.553,68.707
GND on L1 (Signal) "GND_L01_P003" (solid, pour order 3): 113.284,63.5 ccw(c113.538,63.5) 113.538,63.246 115.545,63.246 ccw(c115.541,63.492) 115.787,63.497 115.787,63.635 ccw(c114.831,63.636) 115.787,63.66 ccw(c114.775,63.661) 114.775,64.672 113.44,64.672 ccw(c113.44,64.516) 113.284,64.516
+5 on L1 (Signal) "+5_L01_P000" (solid, pour order 0): 113.665,65.412 ccw(c113.699,65.412) 113.699,65.378 118.037,65.378 ccw(c118.036,65.833) 118.491,65.834 ccw(c118.089,65.844) 118.491,65.842 118.491,71.067 cw(c118.924,71.068) 118.618,71.374 cw(c118.924,71.068) 118.925,71.501 120.672,71.501 ccw(c120.672,72.241) 121.412,72.241 121.412,72.82 121.412,73.152 ccw(c120.777,73.152) 120.777,73.787 117.274,73.787 ccw(c117.271,73.395) 117.231,73.785 114.046,73.787 ccw(c114.046,73.406) 113.665,73.406
GND on L2 (GND) "GND_L02_P011" (solid, pour order 11): 121.177,54 ccw(c121.177,54.898) 121.812,54.263 ccw(c121.113,54.962) 122.102,54.962 122.1,55.057 122.1,102.402 ccw(c121.419,102.402) 121.901,102.883 ccw(c121.374,102.357) 121.374,103.101 121.015,103.1 74.024,103.1 ccw(c74.024,102.076) 73.3,102.8 ccw(c74.265,101.834) 72.9,101.834 72.9,55.3 ccw(c74.107,55.3) 73.254,54.446 73.4,54.3 ccw(c74.124,55.024) 74.124,54
+3V3 on L3 (+3V3) "+3V3_L03_P013" (solid, pour order 13): 121.177,54 ccw(c121.177,54.898) 121.812,54.263 ccw(c121.113,54.962) 122.102,54.962 122.1,55.057 122.1,102.402 ccw(c121.419,102.402) 121.901,102.883 ccw(c121.374,102.357) 121.374,103.101 121.015,103.1 74.024,103.1 ccw(c74.024,102.076) 73.3,102.8 ccw(c74.265,101.834) 72.9,101.834 72.9,55.3 ccw(c74.107,55.3) 73.254,54.446 73.4,54.3 ccw(c74.124,55.024) 74.124,54

## Silkscreen, mask and mechanical layers (free items; w line width, h text height)
Top Overlay:
  text "NRF24" at 90.02,99.72 h0.9 r180
  text "UART" at 76.48,95.42 h0.9 r270
  text "DCF77" at 76.48,84.22 h0.9 r270
  text "SWD" at 118.52,81.58 h0.8 r90
  text "I2C" at 76.48,71.22 h0.9 r270
  text "LCD Display" at 118.32,68.88 h0.9 r90
Top Solder:
  the board outline again, w0.254
Mechanical 1:
  lines w0.254: 72.517,102.324 cw(c73.787,102.324) 73.787,103.594 121.247,103.594 cw(c121.247,102.324) 122.517,102.324 122.517,54.864 cw(c121.247,54.864) 121.247,53.594 73.787,53.594 cw(c73.787,54.864) 72.517,54.864 72.517,102.324 ; 72.517,102.324 ccw(c72.517,102.324) 72.517,102.324

## Text inside footprints (layer, text, board x,y; h text height)
U2: Mechanical 13 "*" at 110.987,76.338 h1.27 r90